# Altium PCB modFOC-MCU.PcbDoc (part 1 of 2)
Units mm, origin at the board's own origin, x right, y up, seen from the top; angles counter-clockwise.
Board outline 45 x 45 mm, 4 copper layers (Top Layer, Mid Layer 1, Mid Layer 2, Bottom Layer), stack 1.531 mm thick; 54 components, 57 nets, 316 pads, 159 vias.
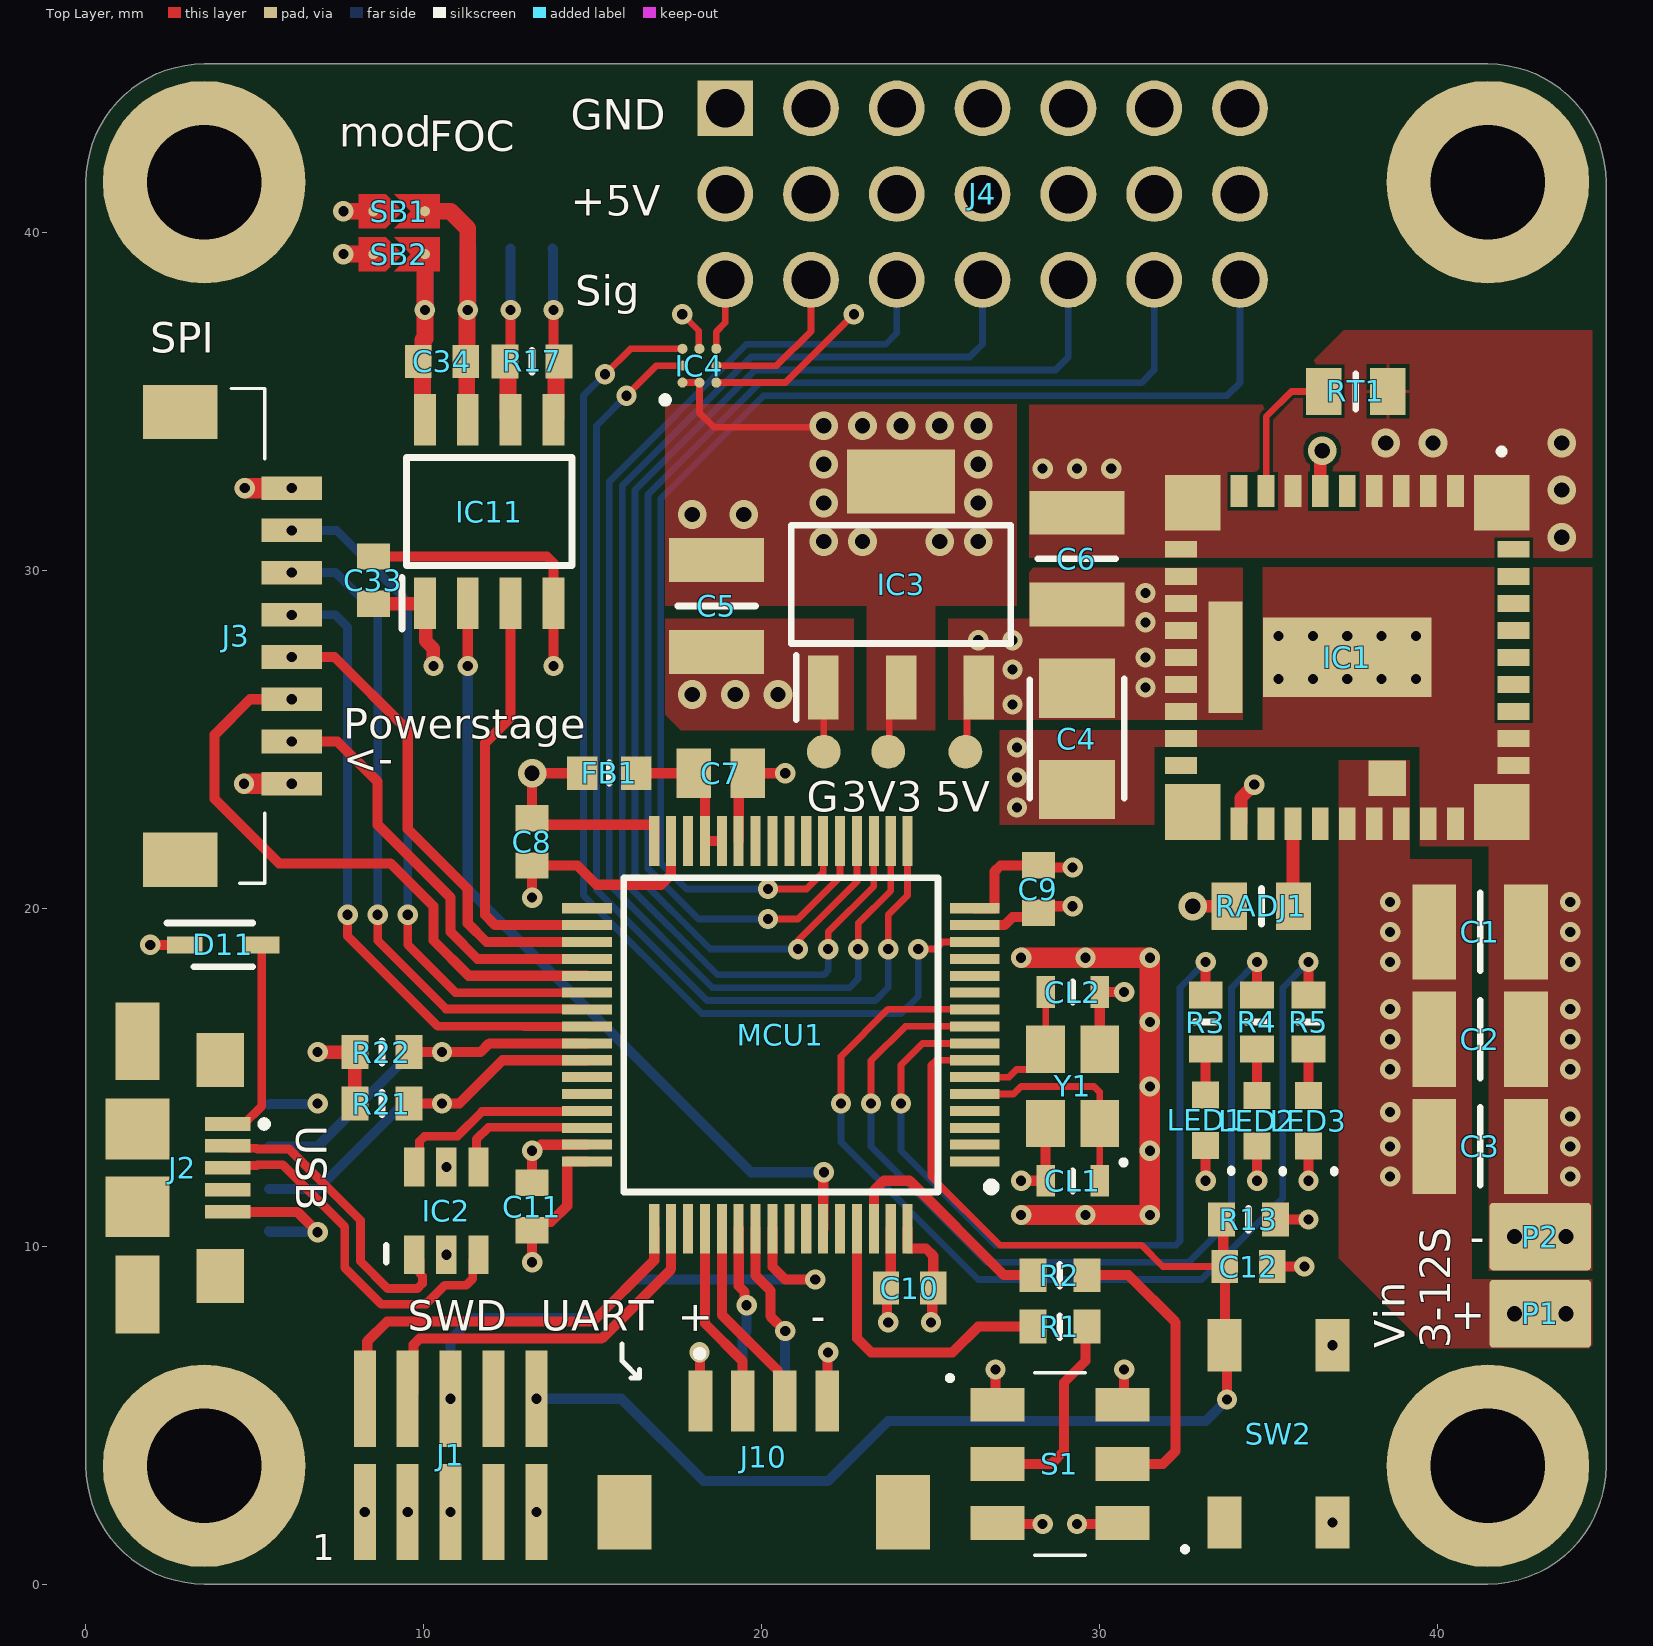
[diagram p0: Top Layer view]
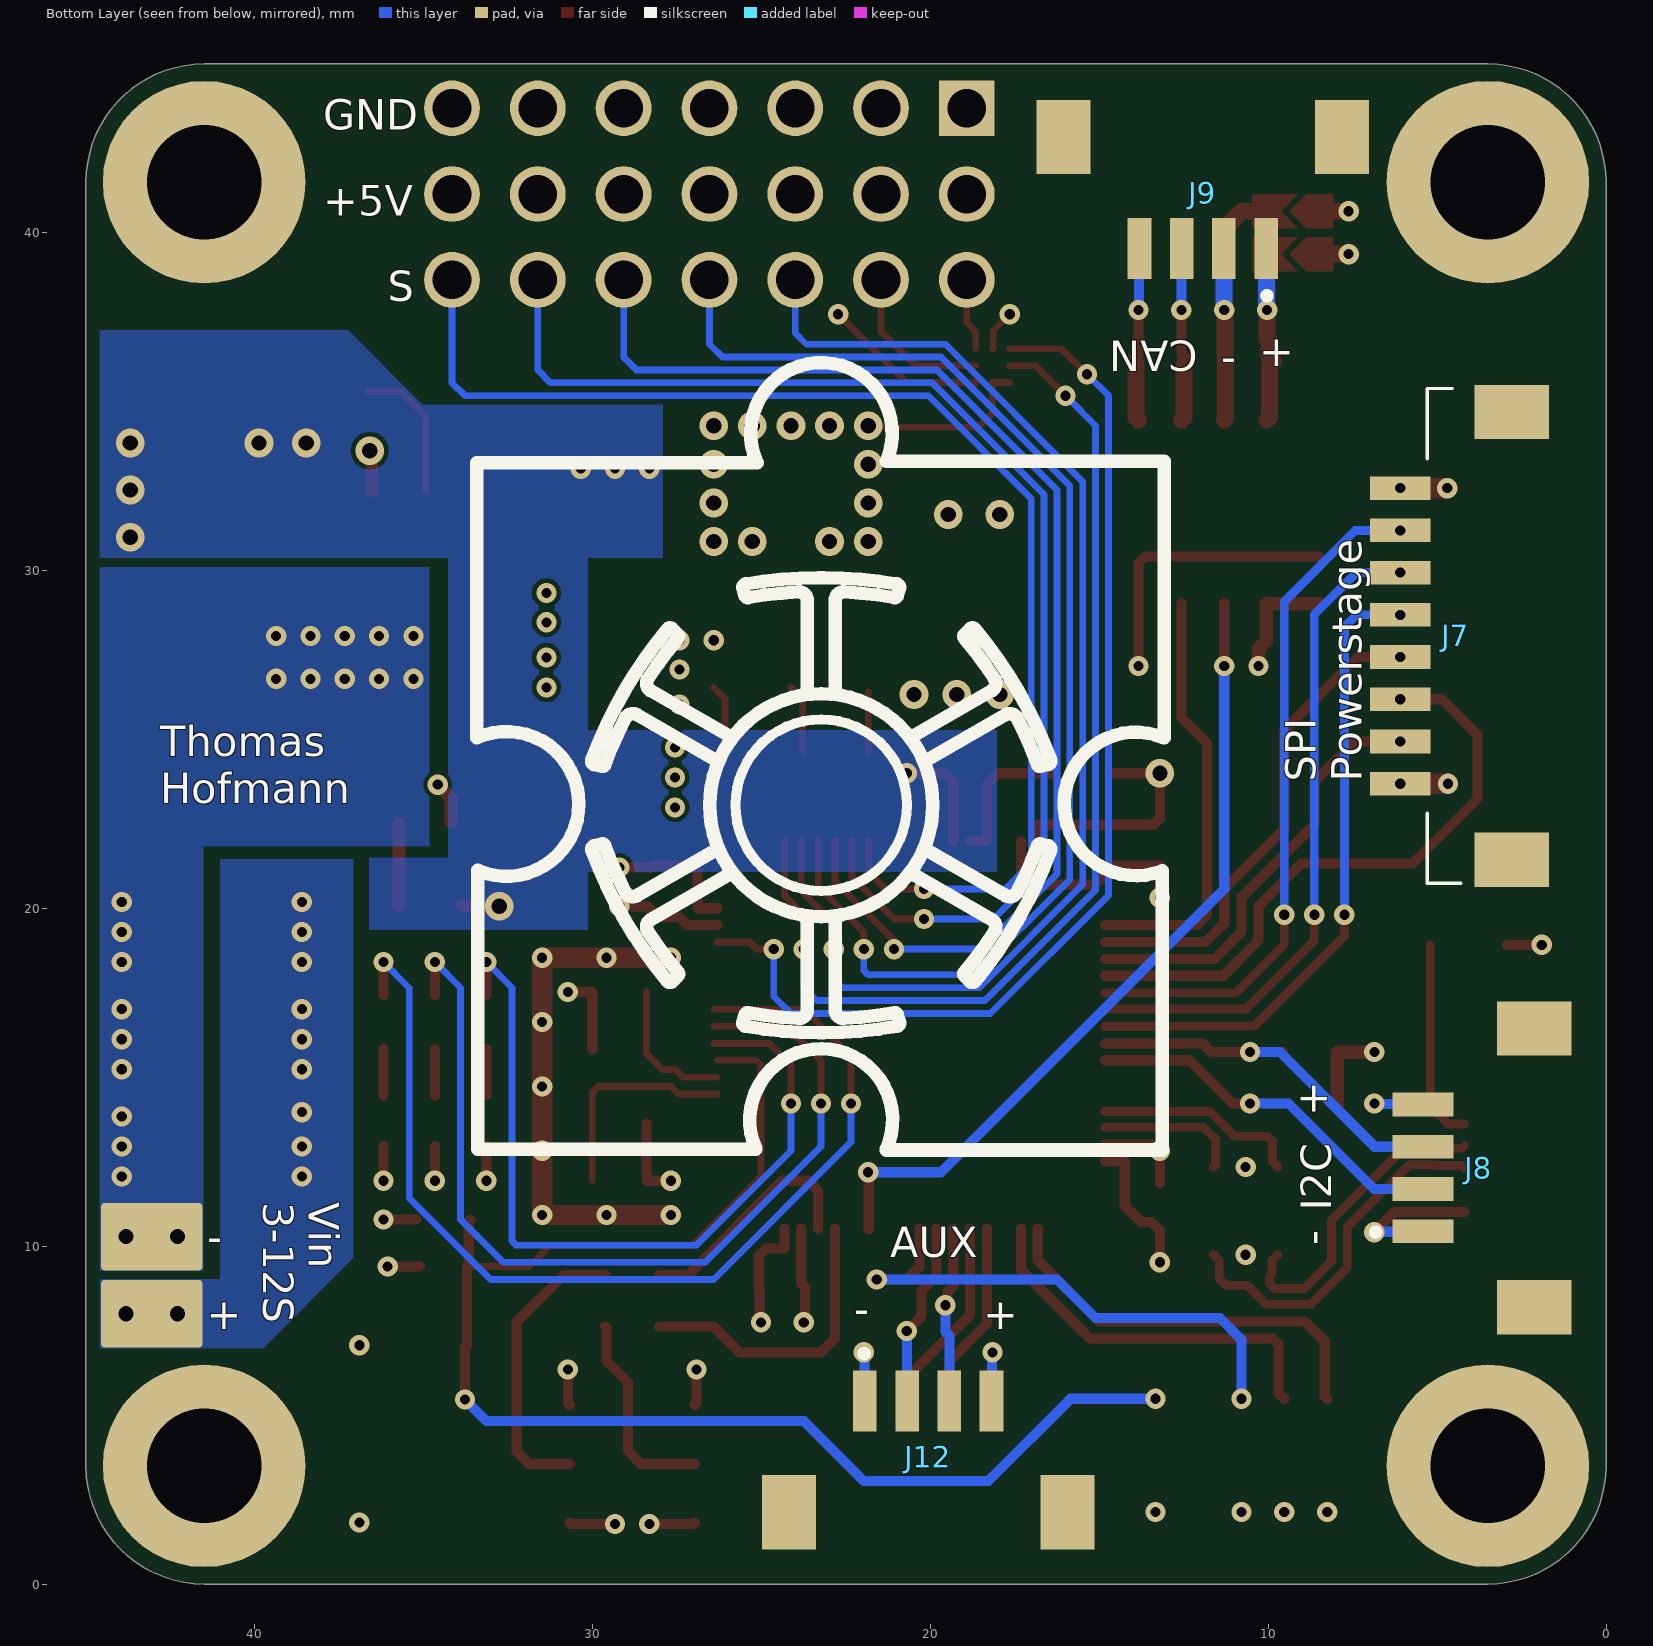
[diagram p1: Bottom Layer view, seen from below]
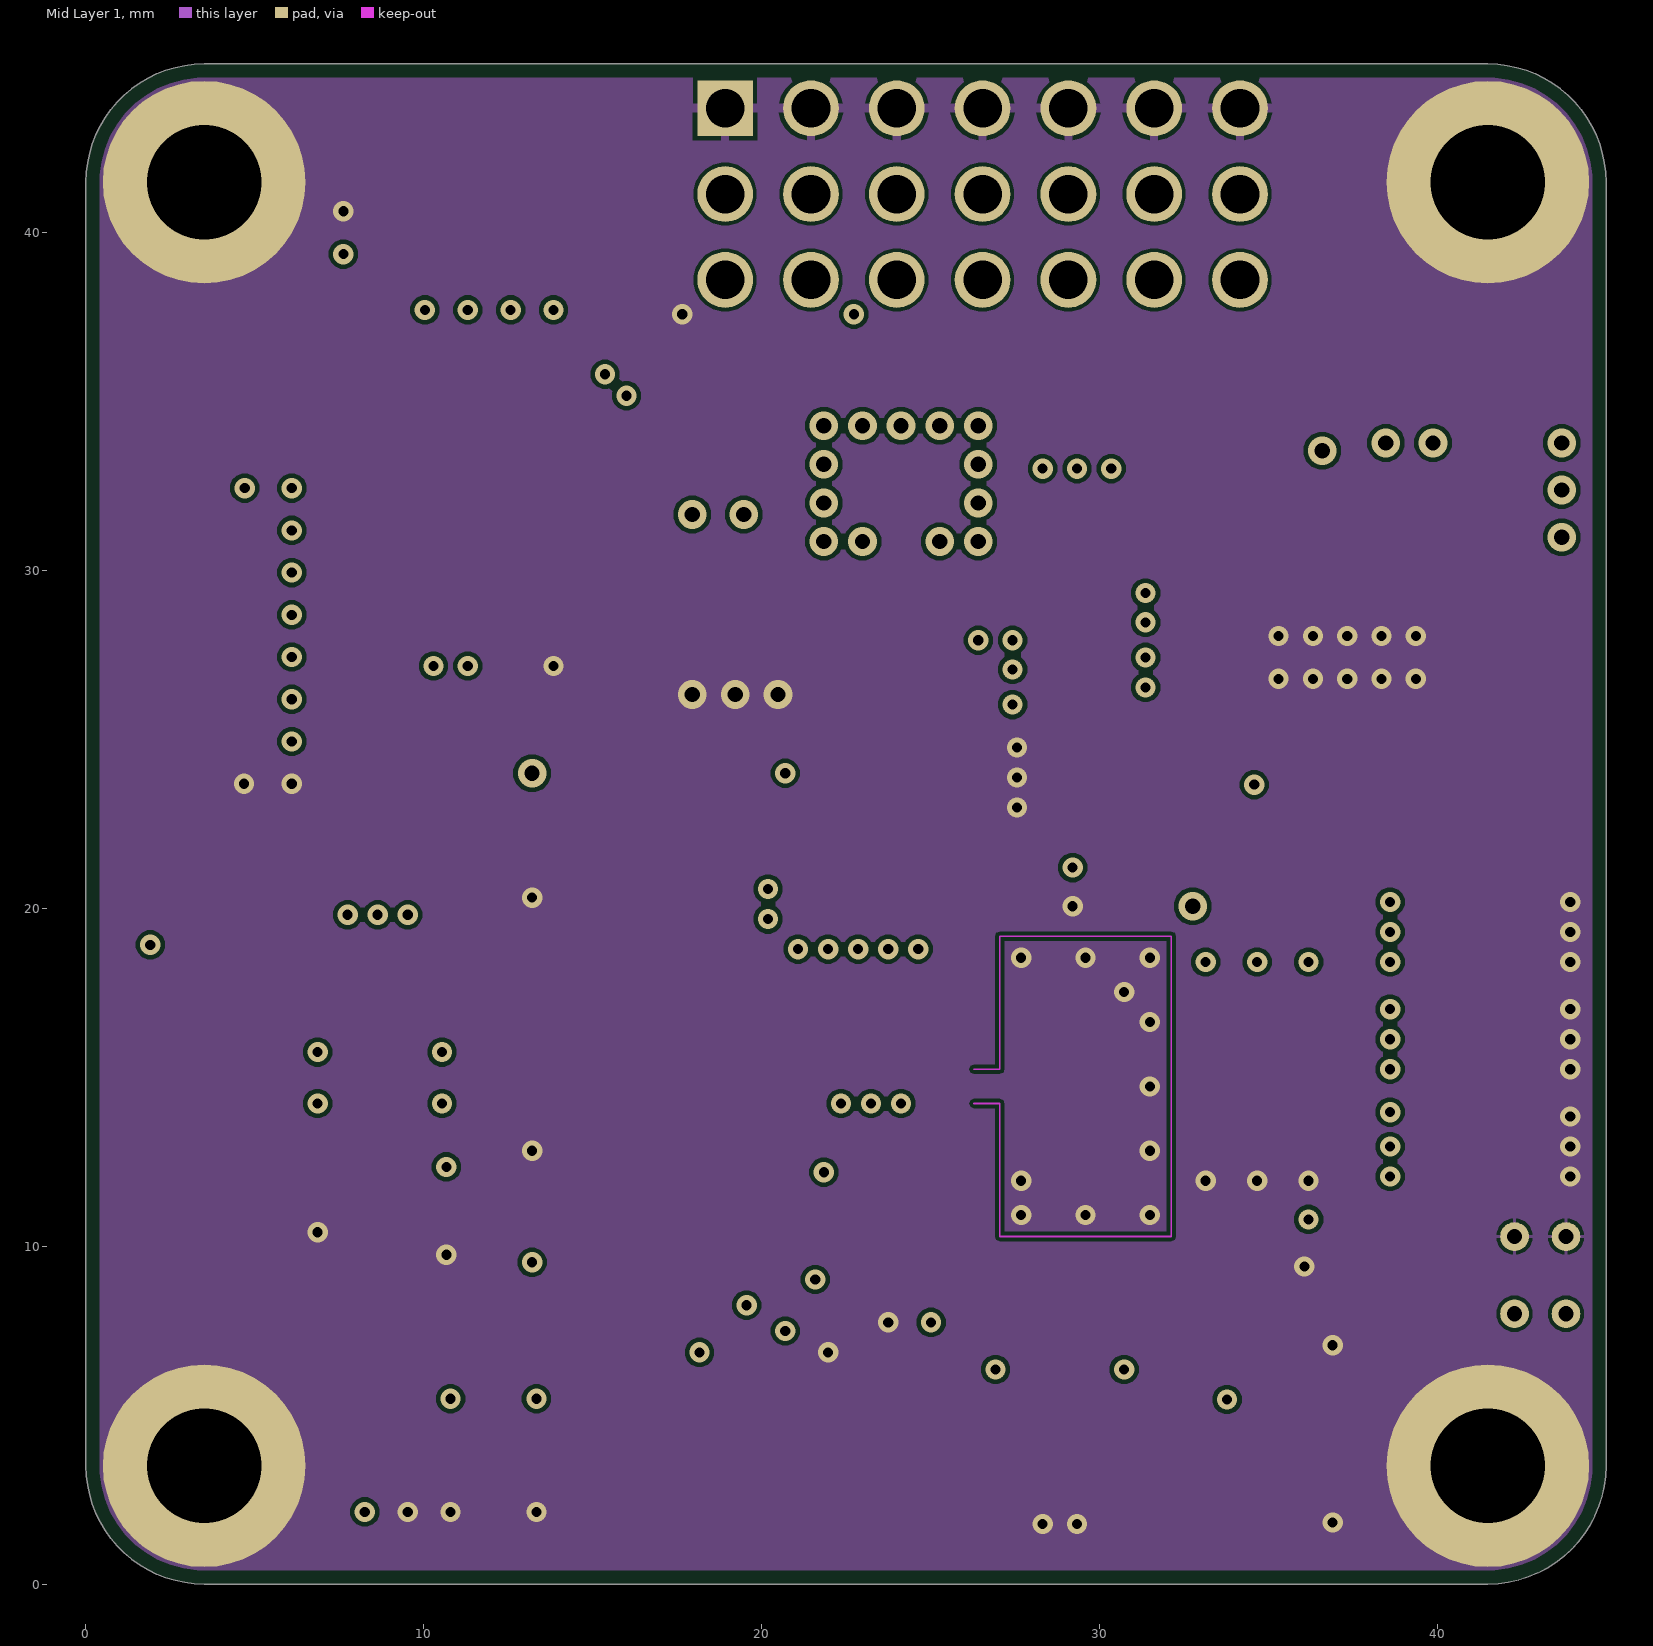
[diagram p2: Mid Layer 1]
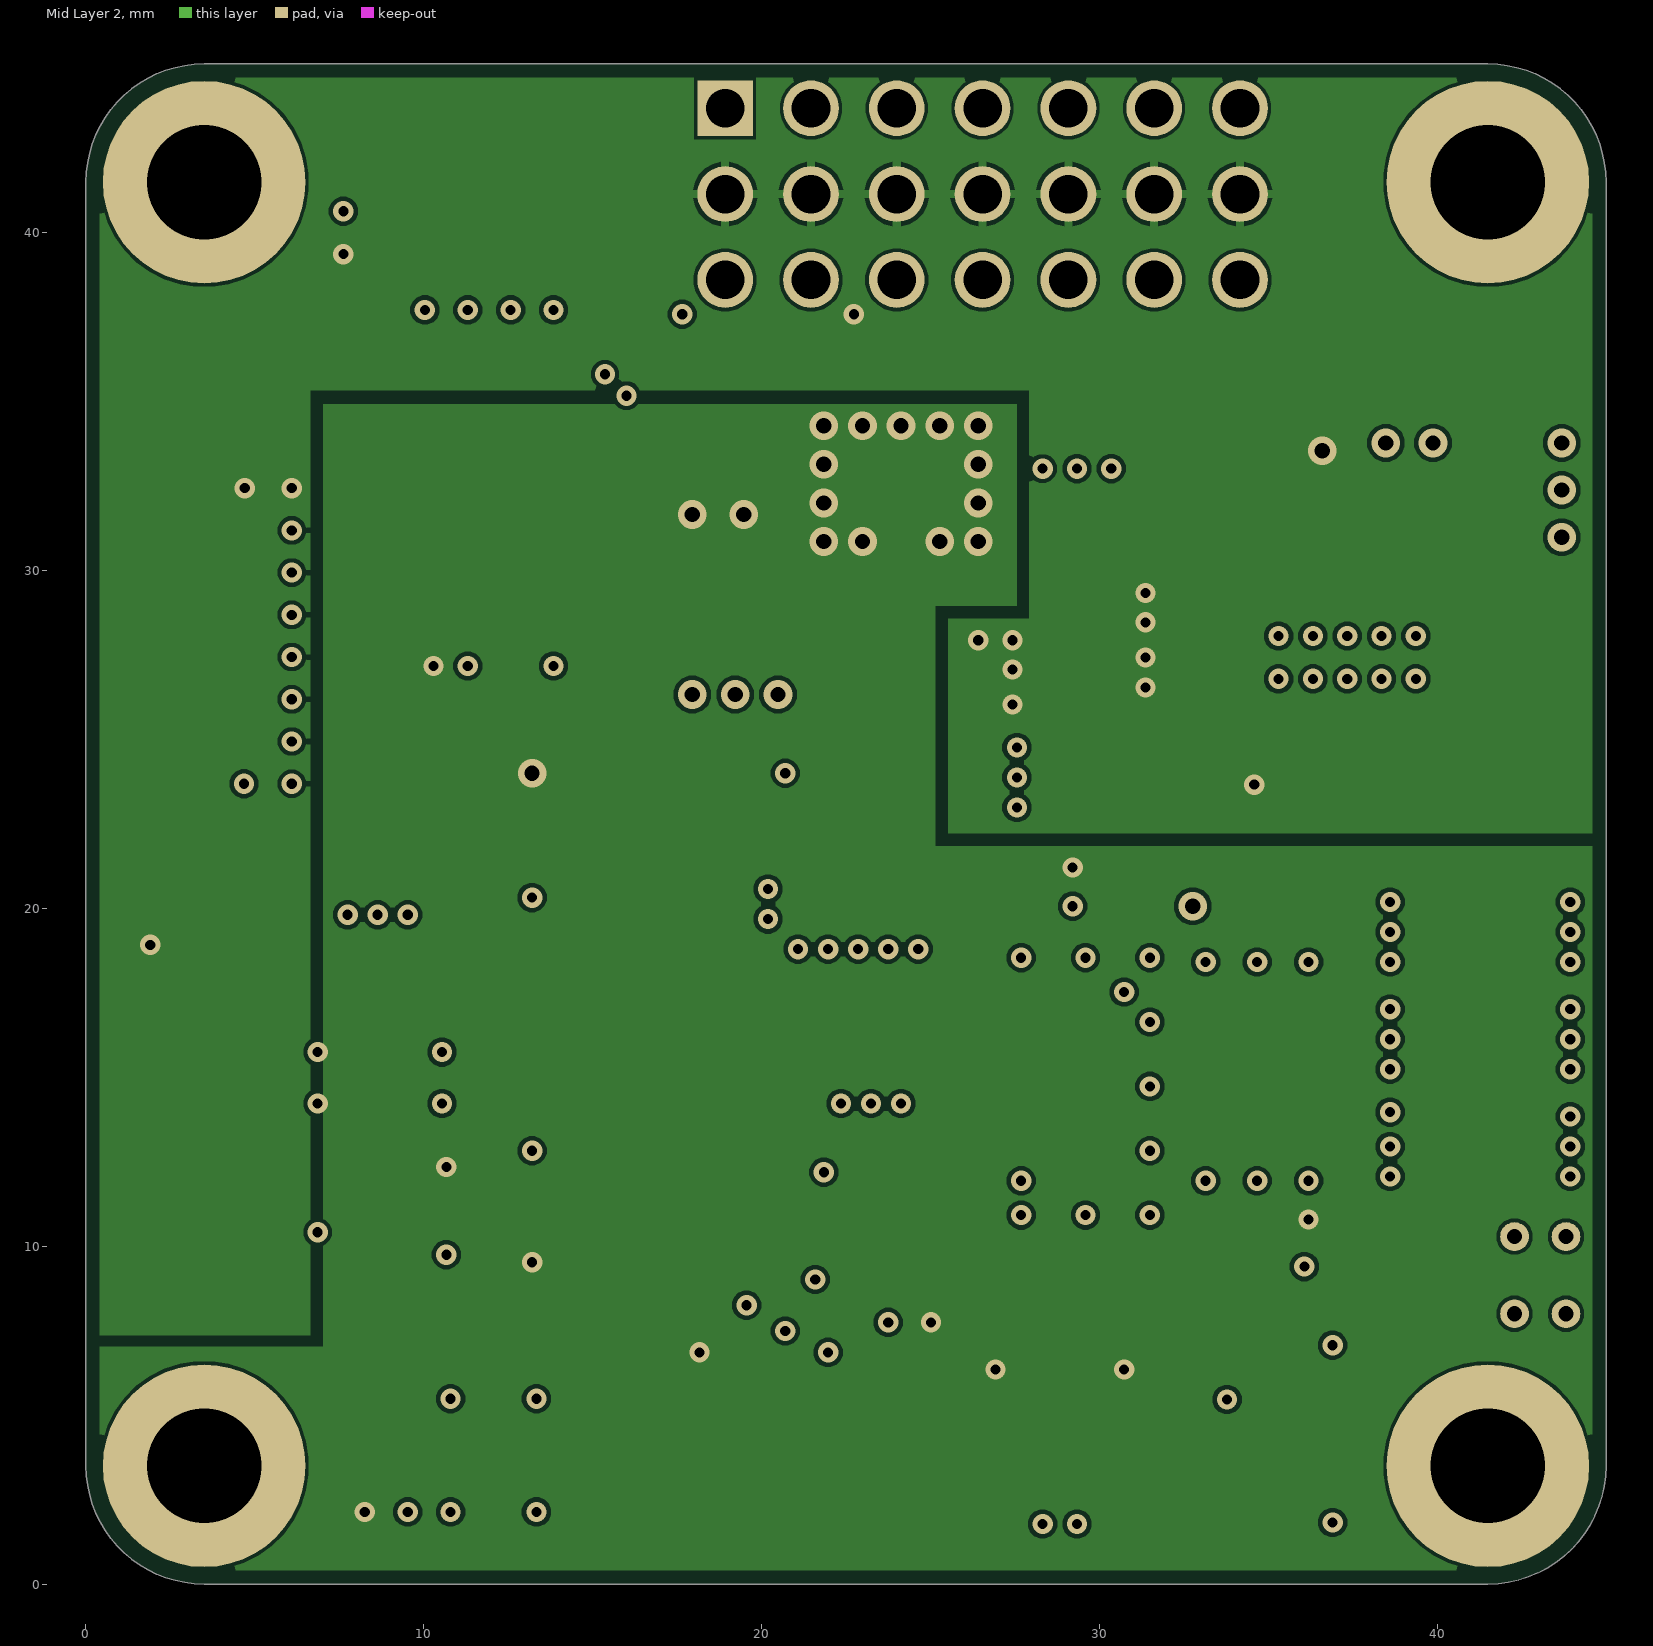
[diagram p3: Mid Layer 2]
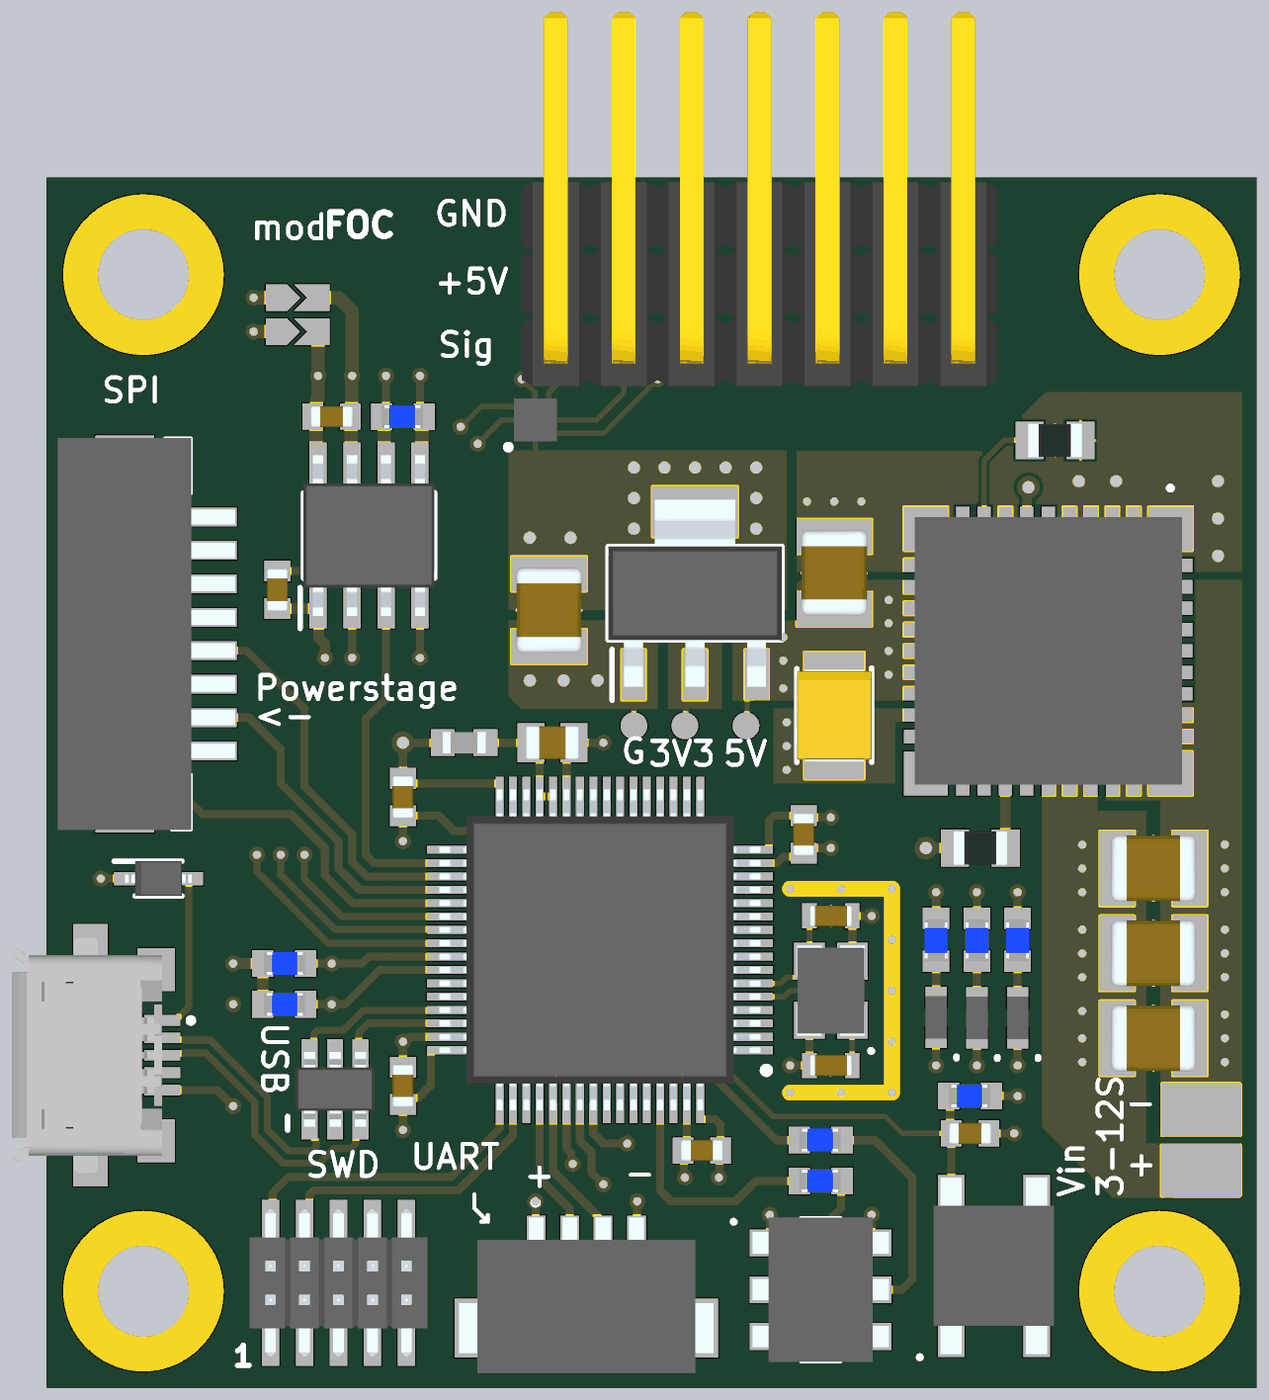
[diagram p4: 3D render of the assembled board from above, using the file's embedded part models]
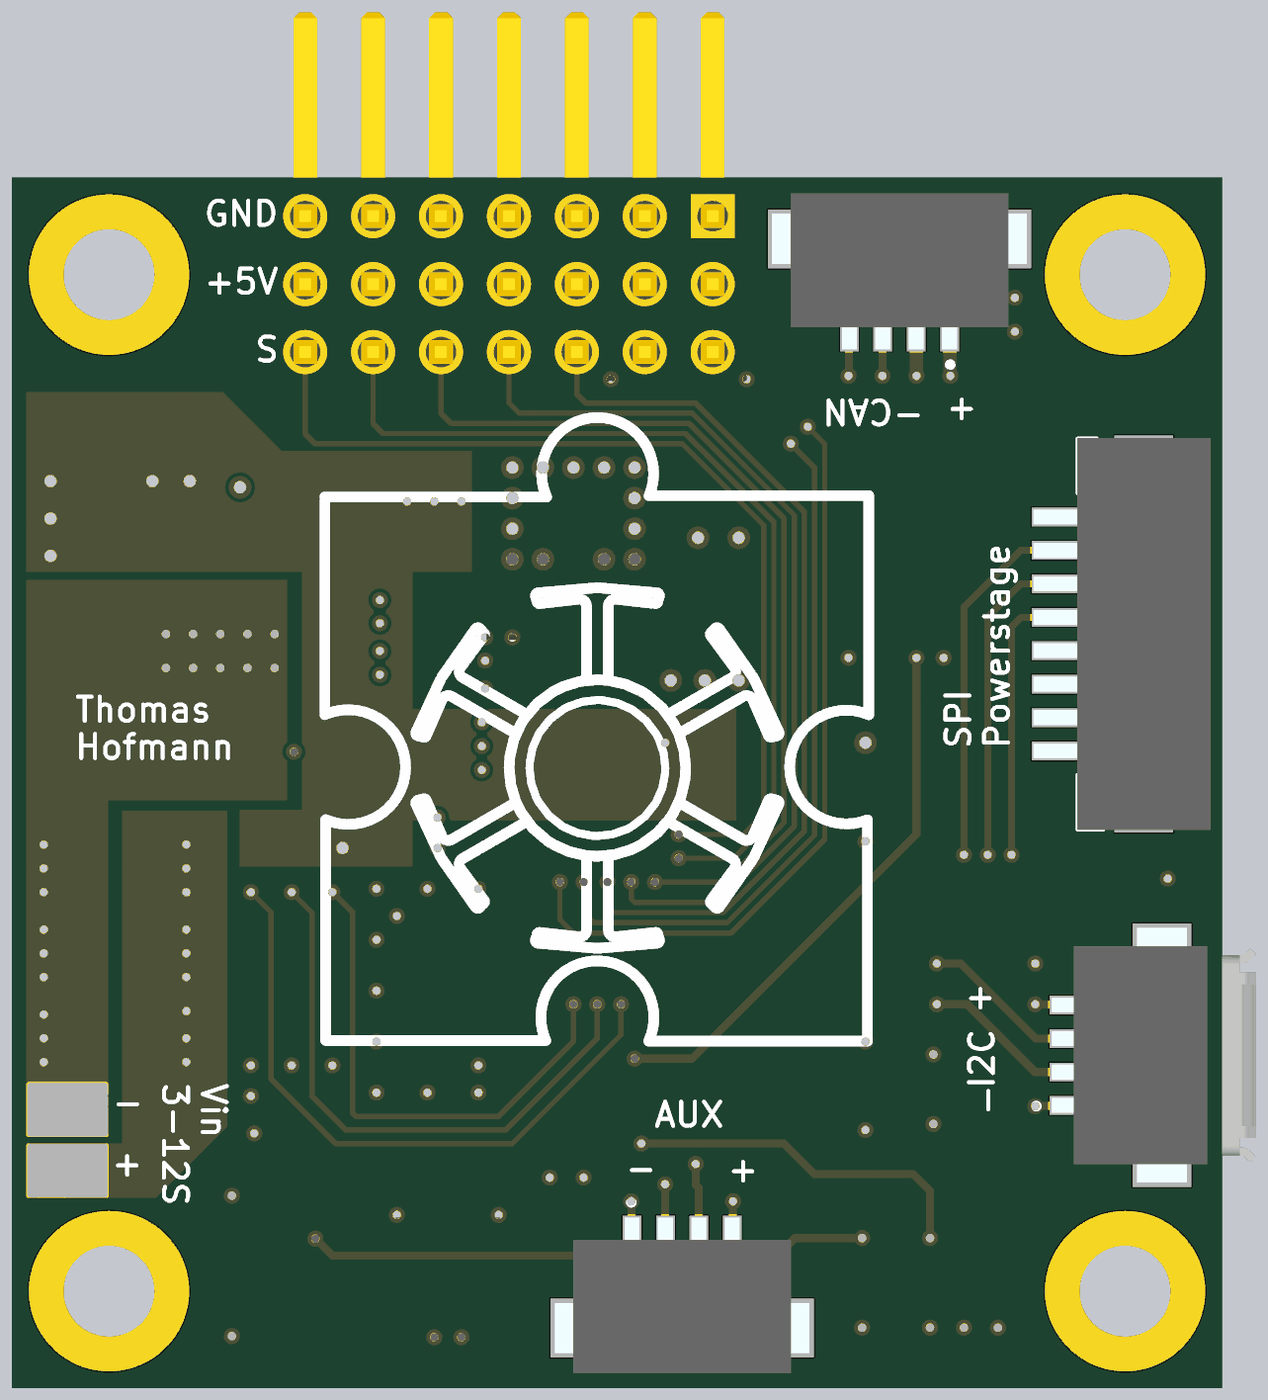
[diagram p5: 3D render of the assembled board from below, using the file's embedded part models]

## Layer stack, top to bottom
Top Solder: solder mask 0.0127, Solder Resist, Dk 3.8
Top Layer: signal copper 0.035
Dielectric 1: prepreg 0.1803, 7628, Dk 4.6
Mid Layer 1: signal copper 0.0175
Core: core 1.065, FR-4, Dk 4.5
Mid Layer 2: signal copper 0.0175
Dielectric 2: prepreg 0.1803, 7628, Dk 4.6
Bottom Layer: signal copper 0.035
Bottom Solder: solder mask 0.0127, Solder Resist, Dk 3.8

## Board outline
45,41.5 ccw(c41.5,41.5) 41.5,45 3.5,45 ccw(c3.5,41.5) 0,41.5 0,3.5 ccw(c3.5,3.5) 3.5,0 41.5,0 ccw(c41.5,3.5) 45,3.5

## Design rules (kind name [scope] priority, off if disabled: settings)
AcuteAngle [All] p1: minimum=6.00000000000000E+0001 checktracksonly=FALSE
BoardOutlineClearance [All] p1: gap=0.4 ignorepadtopadclearanceinfootprint=FALSE
Clearance [All] p1: gap=0.102 ignorepadtopadclearanceinfootprint=FALSE except(0.127: Arc-Arc Arc-Track Track-Track SMDPad-SMDPad SMDPad-Via THPad-Via Via-Fill Via-Poly Via-Region Via-Text; 0.2: Arc-SMDPad Track-SMDPad; 0.25: Arc-Hole Track-Hole SMDPad-Hole THPad-Hole Via-Hole Fill-Hole Poly-Hole Region-Hole Text-Hole; 0.254: Arc-Via Track-Via Via-Via; 0.33: Arc-THPad Track-THPad)
ComponentClearance [All] p1: gap=0.102 collisioncheckmode=3 verticalgap=0.102 showdistances=TRUE
DiffPairsRouting "Schematic Differential Pairs Routing_3" [InNet('USB-D_P')] p1: maxlimit=0.254 minlimit=0.203 mostfreqgap=0.254 toplayer_maxgap=0.203 toplayer_prefgap=0.203 toplayer_minwidth=0.261 toplayer_maxwidth=0.261 toplayer_prefwidth=0.261 midlayer1_minwidth=0.381 midlayer1_maxwidth=0.381 midlayer1_prefwidth=0.381 midlayer2_minwidth=0.381 midlayer2_maxwidth=0.381 midlayer2_prefwidth=0.381 bottomlayer_maxgap=0.203 bottomlayer_prefgap=0.203 bottomlayer_minwidth=0.261 bottomlayer_maxwidth=0.261 bottomlayer_prefwidth=0.261 impedanceprofiledriven=TRUE impedanceprofileid={FED37976-4A96-4117-917E-B578259A096B} maxuncoupledlength=12.7
DiffPairsRouting "Schematic Differential Pairs Routing_2" [InNet('USB-Con-D_P')] p2: maxlimit=0.254 minlimit=0.203 mostfreqgap=0.254 toplayer_maxgap=0.203 toplayer_prefgap=0.203 toplayer_minwidth=0.261 toplayer_maxwidth=0.261 toplayer_prefwidth=0.261 midlayer1_minwidth=0.381 midlayer1_maxwidth=0.381 midlayer1_prefwidth=0.381 midlayer2_minwidth=0.381 midlayer2_maxwidth=0.381 midlayer2_prefwidth=0.381 bottomlayer_maxgap=0.203 bottomlayer_prefgap=0.203 bottomlayer_minwidth=0.261 bottomlayer_maxwidth=0.261 bottomlayer_prefwidth=0.261 impedanceprofiledriven=TRUE impedanceprofileid={FED37976-4A96-4117-917E-B578259A096B} maxuncoupledlength=12.7
DiffPairsRouting [All] p3: maxlimit=0.102 minlimit=0.102 mostfreqgap=0.102 toplayer_minwidth=0.102 toplayer_maxwidth=1816.048 toplayer_prefwidth=0.102 midlayer1_minwidth=0.102 midlayer1_maxwidth=1816.048 midlayer1_prefwidth=0.102 midlayer2_minwidth=0.102 midlayer2_maxwidth=1816.048 midlayer2_prefwidth=0.102 bottomlayer_minwidth=0.102 bottomlayer_maxwidth=1816.048 bottomlayer_prefwidth=0.102 maxuncoupledlength=12.7
Height [All] p1: minheight=0 maxheight=1816.048 prefheight=12.7
HoleSize [All] p1: absolutevalues=TRUE maxlimit=6.3 minlimit=0.3 maxpercent=80.000 minpercent=20.000
HoleToHoleClearance [All] p1: gap=0.5 allowstackedmicrovias=FALSE
MinimumAnnularRing [All] p1: minimumring=0.13
MinimumSolderMaskSliver [All] p1: minsoldermaskwidth=0.1
PlaneClearance [All] p1: clearance=0.102
PlaneConnect PlaneConnectPowerPads [InPadClass('PowerPads')] p1: planeconnectstyle=Direct reliefexpansion=0.508 reliefentries=4 reliefconductorwidth=0.254 reliefairgap=0.254
PlaneConnect [All] p2: pad.planeconnectstyle=Relief pad.reliefexpansion=0.3 pad.reliefentries=4 pad.reliefconductorwidth=0.102 pad.reliefairgap=0.102 via.planeconnectstyle=Direct via.reliefexpansion=0.3 via.reliefentries=4 via.reliefconductorwidth=0.127 via.reliefairgap=0.127
PolygonConnect PolygonConnectPowerPads [All vs (InPadClass('PowerPads'))] p1: connectstyle=Direct reliefconductorwidth=0.254 reliefentries=4 polygonreliefangle="90 Angle" airgapwidth=0.254
PolygonConnect [All] p2: thpad.connectstyle=Relief thpad.reliefconductorwidth=0.102 thpad.reliefentries=4 thpad.polygonreliefangle="90 Angle" thpad.airgapwidth=0.102 smdpad.connectstyle=Relief smdpad.reliefconductorwidth=0.102 smdpad.reliefentries=4 smdpad.polygonreliefangle="90 Angle" smdpad.airgapwidth=0.102 via.connectstyle=Direct via.reliefconductorwidth=0.127 via.reliefentries=4 via.polygonreliefangle="90 Angle" via.airgapwidth=0.127
RoutingVias [All] p1: holewidth=0.45 width=0.85 viastyle="Through Hole" minholewidth=0.3 minwidth=0.6 maxholewidth=6.3 maxwidth=6.55
SilkToSilkClearance [All] p1: silktosilkclearance=0
SilkToSolderMaskClearance [IsPad] p1: minsilkscreentomaskgap=0.15 clearancetoexposedcopper=TRUE
SolderMaskExpansion "SolderMaskExpansion Vias" [IsVia] p1: expansion=0.102 istentingtop=TRUE
SolderMaskExpansion [All] p2: expansion=0.05 istentingtop=FALSE
Width [All] p1: maxlimit=50 minlimit=0.102 preferedwidth=0.3 midlayer1_minwidth=0.127 midlayer2_minwidth=0.127 minimp=50.000000 maximp=50.000000 favimp=50.000000
20 further rules are at their usual default settings.

## Classes and differential pairs
component class modFOC-Power_Module: C1 C2 C3 C4 C5 C6 IC1 IC3 P1 P2 RADJ1 RT1
component class modFOC-MCU: C7 C8 C9 C10 C11 C12 CL1 CL2 D11 FB1 IC2 J1 J2 LED1 LED2 LED3 MCU1 R1 R2 R3 R4 R5 R13 S1 SW2 Y1
component class modFOC-IO: C33 C34 IC4 IC11 J3 J4 J7 J8 J9 J10 J12 R17 R21 R22 SB1 SB2
differential pair USB-D: +USB-D_P -USB-D_N
differential pair USB-Con-D: +USB-Con-D_P -USB-Con-D_N

## Components (designator, comment, footprint, x,y, rotation, side; value= is the part's Value field where it differs from the comment)
C1 "10uF" CAPC3225X280N 41.275,19.304 r0 top
C2 "10uF" CAPC3225X280N 41.275,16.129 r0 top
C3 "10uF" CAPC3225X280N 41.275,12.954 r0 top
C4 "100uF" CAPPM3528X200N 29.337,25.019 r270 top
C5 "10uF" CAPC3225X280N 18.669,28.956 r270 top
C6 "10uF" CAPC3225X280N 29.337,30.353 r90 top
C7 "10nF" CAPC2012X88N 18.796,24.003 r0 top
C8 "100nF" CAPC1608X97N 13.208,21.971 r270 top
C9 "100nF" CAPC1608X97N 28.194,20.574 r270 top
C10 "100nF" CAPC1608X97N 24.384,8.763 r180 top
C11 "100nF" CAPC1608X97N 13.208,11.176 r90 top
C12 "100nF" CAPC1608X97N 34.417,9.398 r0 top
C33 "100nF" CAPC1608X97N 8.509,29.718 r90 top
C34 "100nF" CAPC1608X97N 10.541,36.195 r180 top
CL1 "4pF" CAPC1608X90N 29.21,11.938 r0 top
CL2 "4pF" CAPC1608X90N 29.21,17.526 r180 top
D11 "BAS3010A03WE6327HTSA1" SOD2513X110N 4.064,18.923 r0 top
FB1 "220 Ohm" BEADC1608X75N 15.494,24.003 r0 top
IC1 "LMZ36002RVQT" LMZ36002RVQR 37.338,27.432 r180 top
IC2 "USBLC6-2SC6" SOT95P280X145-6N 10.668,11.049 r90 top
IC3 "AP2114H-3.3TRG1" SOT230P700X180-4N 24.13,29.591 r90 top
IC4 "MAX3394EEBL+T" BGA8C50P3X3_160X160X67 18.161,36.068 r90 top
IC11 "ISO1044BDR" SOIC127P600X175-8N 11.938,31.75 r90 top
J1 "SWD" HUSSP10W40P127_2X5_635X340X420P 10.795,3.81 r0 top
J2 "Micro-USB" 19815841 1.524,12.319 r270 top
J3 "8_PIN" DF13A8P125H21 2.794,28.067 r90 top
J4 "TSW-107-08-G-T-RA" TSW-107-08-T-T-RA_SAI 18.923,43.688 r0 top
J7 "8_PIN" DF13A8P125H21 2.794,28.067 r270 bottom
J8 "DF13A-4P-1.25H_21_" DF13A4P125H21 2.921,12.319 r270 bottom
J9 "DF13A-4P-1.25H_21_" DF13A4P125H21 11.938,42.037 r180 bottom
J10 "DF13A-4P-1.25H_21_" DF13A4P125H21 20.066,2.921 r180 top
J12 "DF13A-4P-1.25H_21_" DF13A4P125H21 20.066,2.921 r0 bottom
LED1 "Green" LGQ396PS35 33.145,13.732 r90 top
LED2 "Green" LGQ396PS35 34.671,13.716 r90 top
LED3 "Green" LGQ396PS35 36.195,13.716 r90 top
MCU1 "STM32G474RBT6" QFP50P1200X1200X160-64N 20.574,16.256 r180 top
P1 "PowerPad" POWER_PAD_S 43.053,8.001 r0 top
P2 "PowerPad" POWER_PAD_S 43.053,10.287 r0 top
R1 "10k" RESC1608X55N 28.829,7.62 r180 top
R2 "10k" RESC1608X55N 28.829,9.144 r180 top
R3 "1k" RESC1608X55N 33.147,16.637 r270 top
R4 "1k" RESC1608X55N 34.671,16.637 r270 top
R5 "1k" RESC1608X55N 36.195,16.637 r270 top
R13 "10k" RESC1608X55N 34.417,10.795 r180 top
R17 "120R" RESC1608X55N 13.208,36.195 r180 top
R21 "10k" RESC1608X55N 8.763,14.224 r0 top
R22 "10k" RESC1608X55N 8.763,15.748 r0 top
RADJ1 "5.05k" R0805 34.798,20.066 r180 top
RT1 "49.9k" R0805 37.592,35.306 r0 top
S1 "CAS-D20A1" CASD20A1 28.829,3.556 r270 top
SB1 "Solder Bridge" SOLDER-BRIDGE_R0603-0R 9.271,40.64 r0 top
SB2 "Solder Bridge" SOLDER-BRIDGE_R0603-0R 9.271,39.37 r0 top
SW2 "RST" PTS647SK38SMTR2LFS 35.306,4.445 r90 top
Y1 "ABM8W-16.0000MHZ-8-B1U-T3" ABM8W160000MHZ8B1UT3 29.21,14.732 r90 top

## Footprints (in the part's own frame and the unit in brackets; to place one, negate y for a bottom-side part, rotate by r counter-clockwise, add the part's x,y. Pads: shape width x height; smd on the part's side, far side on the other; paste and mask are expansions set on the pad)
19815841 [mm]
  rect 0.4x1.35 smd: 1(-1.3,2.675) 2(-0.65,2.675) 3(0,2.675) 4(0.65,2.675) 5(1.3,2.675)
  rect 1.6x1.4 smd: 6(-3.2,2.45) 7(3.2,2.45)
  rect 2.3x1.3 smd: 8(-3.75,0) 9(3.75,0)
  rect 1.8x1.9 smd: 10(-1.15,0) 11(1.15,0)
  silkscreen extent -1.4,3.65 -1.2,3.85, body extent -4.4,-2.93 4.4,2.68, height 2.8
ABM8W160000MHZ8B1UT3 [mm]
  rect 1.4x1.15 smd: 1(-1.1,-0.8) 2(1.1,-0.8) 3(1.1,0.8) 4(-1.1,0.8)
  silkscreen extent -2.3,-1.56 -2.2,-1.46, body extent -1.69,-1.26 1.69,1.26, height 0.85
BEADC1608X75N [mm]
  rect 0.9x1 smd: 1(-0.8,0) 2(0.8,0)
  silkscreen extent 0,-0.3 0,0.3, body extent -0.8,-0.4 0.8,0.4, height 0.75
BGA8C50P3X3_160X160X67 [mm]
  round 0.3 smd: A1(-0.5,0.5) A2(0,0.5) A3(0.5,0.5) B1(-0.5,0) B3(0.5,0) C1(-0.5,-0.5) C2(0,-0.5) C3(0.5,-0.5)
  silkscreen extent -1.11,0.91 -0.92,1.11, body extent -0.8,-0.8 0.8,0.8, height 0.67
CAPC1608X90N [mm]
  rect 0.54x0.94 smd: 1(-0.8,0) 2(0.8,0)
  silkscreen extent 0,-0.3 0,0.3, body extent -0.8,-0.4 0.8,0.4, height 0.9
CAPC1608X97N [mm]
  rect 0.78x0.98 smd: 1(-0.7,0) 2(0.7,0)
  body extent -0.8,-0.4 0.8,0.4, height 0.97
CAPC2012X88N [mm]
  rect 1.02x1.47 smd: 1(-0.8,0) 2(0.8,0)
  body extent -1,-0.63 1,0.63, height 0.88
CAPC3225X280N [mm]
  rect 1.3x2.82 smd: 1(-1.36,0) 2(1.36,0)
  silkscreen extent 0,-1.15 0,1.15, body extent -1.6,-1.25 1.6,1.25, height 2.8
CAPPM3528X200N [mm]
  rect 1.75x2.25 smd: 1(-1.5,0) 2(1.5,0)
  silkscreen extent -1.78,-1.4 1.75,1.4, body extent -1.75,-1.4 1.75,1.4, height 2
CASD20A1 [mm]
  rect 1x1.6 smd: 1(-1.75,-1.85) 2(0,-1.85) 3(1.75,-1.85) 4(-1.75,1.85) 5(0,1.85) 6(1.75,1.85)
  silkscreen extent -2.7,-3.3 2.7,0.75, body extent -2.7,-2.55 2.7,2.55, height 2.6
DF13A4P125H21 [mm]
  rect 0.7x1.8 smd: 1(1.875,-2.5) 2(0.625,-2.5) 3(-0.625,-2.5) 4(-1.875,-2.5)
  rect 1.6x2.2 smd: MP1(-4.125,0.8) MP2(4.125,0.8)
  silkscreen extent 1.8,-4 2,-3.8, body extent -4.76,-3.33 4.76,2.5, height 3.7
DF13A8P125H21 [mm]
  rect 0.7x1.8 smd: 1(4.375,-3.3) 2(3.125,-3.3) 3(1.875,-3.3) 4(0.625,-3.3) 5(-0.625,-3.3) 6(-1.875,-3.3) 7(-3.125,-3.3) 8(-4.375,-3.3)
  rect 1.6x2.2 smd: MP1(-6.625,0) MP2(6.625,0)
  silkscreen extent -7.32,-2.5 7.32,-1.5, body extent -7.32,-4.13 7.32,2.5, height 3.7
HUSSP10W40P127_2X5_635X340X420P [mm]
  rect 0.65x2.85 smd: 1(-2.54,-1.675) 2(-2.54,1.675) 3(-1.27,-1.675) 4(-1.27,1.675) 5(0,-1.675) 6(0,1.675) 7(1.27,-1.675) 8(1.27,1.675) 9(2.54,-1.675) 10(2.54,1.675)
  body extent -3.32,-2.75 3.32,2.75, height 5.13
LGQ396PS35 [mm]
  rect 0.8x0.8 smd: 1(-0.75,0) 2(0.75,0)
  silkscreen extent -1.52,-0.76 -1.47,-0.76, body extent -0.8,-0.4 0.8,0.4, height 0.5
LMZ36002RVQR [mm]
  rect 1.65x1.65 smd: 1(-4.575,-4.575) 11(4.575,-4.575) 21(4.575,4.575) 31(-4.575,4.575)
  rect 0.5x0.95 smd: 2(-3.2,-4.925) 3(-2.4,-4.925) 4(-1.6,-4.925) 5(-0.8,-4.925) 6(0,-4.925) 7(0.8,-4.925) 8(1.6,-4.925) 9(2.4,-4.925) 10(3.2,-4.925) 22(3.2,4.925) 23(2.4,4.925) 24(1.6,4.925) 25(0.8,4.925) 26(0,4.925) 27(-0.8,4.925) 28(-1.6,4.925) 29(-2.4,4.925) 30(-3.2,4.925)
  rect 0.95x0.5 smd: 12(4.925,-3.2) 13(4.925,-2.4) 14(4.925,-1.6) 15(4.925,-0.8) 16(4.925,0) 17(4.925,0.8) 18(4.925,1.6) 19(4.925,2.4) 20(4.925,3.2) 32(-4.925,3.2) 33(-4.925,2.4) 34(-4.925,1.6) 35(-4.925,0.8) 36(-4.925,0) 37(-4.925,-0.8) 38(-4.925,-1.6) 39(-4.925,-2.4) 40(-4.925,-3.2)
  rect 5x2.35 smd: 41(0,0)
  rect 1.12x1.05 smd: 42(-1.187,3.575)
  rect 1x3.3 smd: 43(3.6,0)
  silkscreen extent -4.62,-6.15 -4.52,-6.05, body extent -5,-5 5,5, height 2.23
POWER_PAD_S [mm]
  round 0.85 hole 0.45: 1(-0.762,0) 1(0.762,0)
  rrect10% 3x2 smd: 1(0,0)
  rrect10% 3x2 smd far side: 1(0,0)
PTS647SK38SMTR2LFS [mm]
  rect 1.55x1 smd: 1(-2.625,1.6) 2(2.625,1.6) 3(-2.625,-1.6) 4(2.625,-1.6)
  silkscreen extent -3.46,2.72 -3.36,2.82, body extent -3.3,-2.25 3.3,2.25, height 3.9
QFP50P1200X1200X160-64N [mm]
  rect 1.475x0.298 smd: 1(-5.738,3.75) 2(-5.738,3.25) 3(-5.738,2.75) 4(-5.738,2.25) 5(-5.738,1.75) 6(-5.738,1.25) 7(-5.738,0.75) 8(-5.738,0.25) 9(-5.738,-0.25) 10(-5.738,-0.75) 11(-5.738,-1.25) 12(-5.738,-1.75) 13(-5.738,-2.25) 14(-5.738,-2.75) 15(-5.738,-3.25) 16(-5.738,-3.75) 33(5.738,-3.75) 34(5.738,-3.25) 35(5.738,-2.75) 36(5.738,-2.25) 37(5.738,-1.75) 38(5.738,-1.25) 39(5.738,-0.75) 40(5.738,-0.25) 41(5.738,0.25) 42(5.738,0.75) 43(5.738,1.25) 44(5.738,1.75) 45(5.738,2.25) 46(5.738,2.75) 47(5.738,3.25) 48(5.738,3.75)
  rect 0.298x1.475 smd: 17(-3.75,-5.738) 18(-3.25,-5.738) 19(-2.75,-5.738) 20(-2.25,-5.738) 21(-1.75,-5.738) 22(-1.25,-5.738) 23(-0.75,-5.738) 24(-0.25,-5.738) 25(0.25,-5.738) 26(0.75,-5.738) 27(1.25,-5.738) 28(1.75,-5.738) 29(2.25,-5.738) 30(2.75,-5.738) 31(3.25,-5.738) 32(3.75,-5.738) 49(3.75,5.738) 50(3.25,5.738) 51(2.75,5.738) 52(2.25,5.738) 53(1.75,5.738) 54(1.25,5.738) 55(0.75,5.738) 56(0.25,5.738) 57(-0.25,5.738) 58(-0.75,5.738) 59(-1.25,5.738) 60(-1.75,5.738) 61(-2.25,5.738) 62(-2.75,5.738) 63(-3.25,5.738) 64(-3.75,5.738)
  silkscreen extent -6.35,-4.65 4.65,4.65, body extent -6,-6 6,6, height 1.6
R0805 [mm]
  rect 1.05x1.4 smd: 1(-0.95,0) 2(0.95,0)
  silkscreen extent 0,-0.53 0,0.53, body extent -1,-0.63 1,0.63, height 0.7
RESC1608X55N [mm]
  rect 0.8x1 smd: 1(-0.8,0) 2(0.8,0)
  silkscreen extent 0,-0.33 0,0.33, body extent -0.75,-0.42 0.8,0.42, height 0.45
SOD2513X110N [mm]
  rect 1.05x0.5 smd: 1(-1.138,0) 2(1.138,0)
  silkscreen extent -1.66,-0.65 0.87,0.65, body extent -1.25,-0.65 1.25,0.65, height 1.1
SOIC127P600X175-8N [mm]
  rect 1.525x0.65 smd: 1(-2.712,1.905) 2(-2.712,0.635) 3(-2.712,-0.635) 4(-2.712,-1.905) 5(2.712,-1.905) 6(2.712,-0.635) 7(2.712,0.635) 8(2.712,1.905)
  silkscreen extent -3.47,-2.45 1.6,2.58, body extent -3,-2.45 3,2.45, height 1.75
SOLDER-BRIDGE_R0603-0R [mm]
  round 0.3 smd: 1(-0.762,0) 2(0.762,0)
  Top Layer region: -1.2,0.5 -1.2,-0.5 -0.4,-0.5 0.1,0 -0.4,0.5 -1.2,0.5
  Top Layer region: -0.15,-0.5 0.35,0 -0.15,0.5 1.2,0.5 1.2,-0.5 -0.15,-0.5
SOT95P280X145-6N [mm]
  rect 1.15x0.6 smd: 1(-1.3,0.95) 2(-1.3,0) 3(-1.3,-0.95) 4(1.3,-0.95) 5(1.3,0) 6(1.3,0.95)
  silkscreen extent -1.52,1.78 -1.02,1.78, body extent -1.4,-1.46 1.4,1.46, height 1.45
SOT230P700X180-4N [mm]
  rect 1.9x0.9 smd: 1(-3.05,2.3) 2(-3.05,0) 3(-3.05,-2.3)
  rect 1.9x3.2 smd: 4(3.05,0)
  silkscreen extent -4,-3.25 1.75,3.25, body extent -3.5,-3.25 3.5,3.25, height 1.8
TSW-107-08-T-T-RA_SAI [mil]
  rect 65x65 hole 45 mask+0: 1(0,0)
  round 65 hole 45 mask+0: 2(0,-100) 3(0,-200) 4(100,0) 5(100,-100) 6(100,-200) 7(200,0) 8(200,-100) 9(200,-200) 10(300,0) 11(300,-100) 12(300,-200) 13(400,0) 14(400,-100) 15(400,-200) 16(500,0) 17(500,-100) 18(500,-200) 19(600,0) 20(600,-100) 21(600,-200)
  body extent -50,-250 650,300, height 353

## Part data
C1 C2 C3 C5 C6: library part CL32B106KMVNNWE, "Capacitor", Manufacturer_Name="Samsung Electro-Mechanics", Mouser Part Number=N/A, Arrow Part Number=CL32B106KMVNNWE, Arrow Price/Stock=https://www.arrow.com/en/products/cl32b106kmvnnwe/samsung-electro-mechanics, Datasheet Link=https://www.arrow.com/en/products/cl32b106kmvnnwe/samsung-electro-mechanics, Height=2.8mm, Manufacturer_Part_Number=CL32B106KMVNNWE, Mouser Price/Stock=https://www.mouser.co.uk/ProductDetail/Samsung-Electro-Mechanics/CL32B106KMVNNWE?qs=xZ%2FP%252Ba9zWqaEMBbSgKy8gQ%3D%3D
C4: library part 8TPE100MAZB, "Capacitor Polarised", Manufacturer_Name=Panasonic, Mouser Part Number=667-8TPE100MAZB, Arrow Part Number=8TPE100MAZB, Arrow Price/Stock=https://www.arrow.com/en/products/8tpe100mazb/panasonic, Datasheet Link=http://uk.rs-online.com/web/p/products/7887374, Height=2mm, Manufacturer_Part_Number=8TPE100MAZB, Mouser Price/Stock=https://www.mouser.co.uk/ProductDetail/Panasonic/8TPE100MAZB?qs=OE1iw1LrrPHKTwwfsidxgA%3D%3D
C7: library part C0805C103J3GACTU, "Capacitor", Manufacturer_Name=Kemet, Mouser Part Number=80-C0805C103J3G, Arrow Part Number=C0805C103J3GACTU, Arrow Price/Stock=https://www.arrow.com/en/products/c0805c103j3gactu/kemet-corporation, Datasheet Link=https://componentsearchengine.com/Datasheets/2/C0805C103J3GACTU.pdf, Height=0.88mm, Manufacturer_Part_Number=C0805C103J3GACTU, Mouser Price/Stock=https://www.mouser.co.uk/ProductDetail/KEMET/C0805C103J3GACTU?qs=K%2Fj%2Fqf%252B0fqJFcB%2FiaHub0Q%3D%3D
C8 C9 C10 C11 C12 C33 C34: library part VJ0603Y104JXJAC, "Capacitor", Manufacturer_Name=Vishay, Mouser Part Number=77-VJ0603Y104JXJAC, Datasheet Link=http://www.vishay.com/docs/45226/vj31xrohsautomlcc.pdf, Height=0.97mm, Manufacturer_Part_Number=VJ0603Y104JXJAC, Mouser Price/Stock=https://www.mouser.com/Search/Refine.aspx?Keyword=77-VJ0603Y104JXJAC
CL1 CL2: library part CL10C040CB8NNNC, "Capacitor", Manufacturer_Name="Samsung Electro-Mechanics", Mouser Part Number=N/A, Arrow Part Number=CL10C040CB8NNNC, Arrow Price/Stock=https://www.arrow.com/en/products/cl10c040cb8nnnc/samsung-electro-mechanics, Datasheet Link=https://datasheet.lcsc.com/szlcsc/Samsung-Electro-Mechanics-CL10C040CB8NNNC_C307494.pdf, Height=0.9mm, Manufacturer_Part_Number=CL10C040CB8NNNC, Mouser Price/Stock=https://www.mouser.co.uk/ProductDetail/Samsung-Electro-Mechanics/CL10C040CB8NNNC?qs=X6jEic%2FHinCXvSxHicvHqA%3D%3D
D11: "Diode", Manufacturer_Name=Infineon, Mouser Part Number=726-BAS3010A-03WE6, Arrow Part Number=BAS3010A03WE6327HTSA1, Arrow Price/Stock=https://www.arrow.com/en/products/bas3010a03we6327htsa1/infineon-technologies-ag, Datasheet Link=https://www.infineon.com/dgdl/Infineon-BAS3010ASERIES-DS-v01_01-en.pdf?fileId=db3a30431ddc9372011dfbc50f231c06, Height=1.1mm, Manufacturer_Part_Number=BAS3010A03WE6327HTSA1, Mouser Price/Stock=https://www.mouser.co.uk/ProductDetail/Infineon-Technologies/BAS3010A03WE6327HTSA1?qs=K00xGehIljtEbk1%252B2pLZ%252BQ%3D%3D
FB1: library part MPZ1608S221ATA00, "Ferrite Bead", Manufacturer_Name=TDK, Mouser Part Number=810-MPZ1608S221ATA00, Arrow Part Number=MPZ1608S221ATA00, Arrow Price/Stock=https://www.arrow.com/en/products/mpz1608s221ata00/tdk, Datasheet Link=https://product.tdk.com/info/en/catalog/datasheets/beads_commercial_power_mpz1608_en.pdf, Height=0.75mm, Manufacturer_Part_Number=MPZ1608S221ATA00, Mouser Price/Stock=https://www.mouser.co.uk/ProductDetail/TDK/MPZ1608S221ATA00/?qs=pLY5GE0xrmLZeKkazChaNg%3D%3D
IC1: "Integrated Circuit", Manufacturer_Name="Texas Instruments", Mouser Part Number=595-LMZ36002RVQT, Arrow Part Number=LMZ36002RVQT, Arrow Price/Stock=https://www.arrow.com/en/products/lmz36002rvqt/texas-instruments, Datasheet Link=http://www.ti.com/lit/gpn/lmz36002, Height=2.13mm, Manufacturer_Part_Number=LMZ36002RVQT, Mouser Price/Stock=https://www.mouser.co.uk/ProductDetail/Texas-Instruments/LMZ36002RVQT?qs=kFLL9AfgRSBjXTxBMSjGOw%3D%3D
IC2: "Integrated Circuit", Manufacturer_Name=STMicroelectronics, Mouser Part Number=511-USBLC6-2SC6, Arrow Part Number=USBLC6-2SC6, Arrow Price/Stock=https://www.arrow.com/en/products/usblc6-2sc6/stmicroelectronics, Datasheet Link=http://www.st.com/st-web-ui/static/active/en/resource/technical/document/datasheet/CD00050750.pdf, Height=1.45mm, Manufacturer_Part_Number=USBLC6-2SC6, Mouser Price/Stock=https://www.mouser.co.uk/ProductDetail/STMicroelectronics/USBLC6-2SC6?qs=po45yt2pPpu%2FhNIlwQdTlg%3D%3D
IC3: "Integrated Circuit", Manufacturer_Name="Diodes Inc.", Mouser Part Number=621-AP2114H-3.3TRG1, Arrow Part Number=AP2114H-3.3TRG1, Arrow Price/Stock=https://www.arrow.com/en/products/ap2114h-3.3trg1/diodes-incorporated, Datasheet Link=http://uk.rs-online.com/web/p/products/8283528, Height=1.8mm, Manufacturer_Part_Number=AP2114H-3.3TRG1, Mouser Price/Stock=https://www.mouser.co.uk/ProductDetail/Diodes-Incorporated/AP2114H-33TRG1?qs=x6A8l6qLYDDSG%2FfwzcsOhw%3D%3D
IC4: "Integrated Circuit", Manufacturer_Name="Maxim Integrated", Mouser Part Number=700-MAX3394EEBLT, Datasheet Link=https://datasheets.maximintegrated.com/en/ds/MAX3394E-MAX3396E.pdf, Height=0.67mm, Manufacturer_Part_Number=MAX3394EEBL+T, Mouser Price/Stock=https://www.mouser.co.uk/ProductDetail/Maxim-Integrated/MAX3394EEBL%2bT?qs=LHmEVA8xxfZSpxRu22m1hw%3D%3D
IC11: "Integrated Circuit", Manufacturer_Name="Texas Instruments", Mouser Part Number=595-ISO1044BDR, Datasheet Link=http://www.ti.com/lit/gpn/iso1044?HQS=ti-null-null-sf-df-pf-sep-wwe&DCM=yes, Height=1.75mm, Manufacturer_Part_Number=ISO1044BDR, Mouser Price/Stock=https://www.mouser.co.uk/ProductDetail/Texas-Instruments/ISO1044BDR/?qs=DuoOggApuK9UGD9QQWYeTA%3D%3D
J1: library part M50-3600542R, "Connector", Manufacturer_Name=Harwin, Mouser Part Number=855-M50-3600542R, Datasheet Link=https://cdn.harwin.com/pdfs/M50-360R.pdf, Manufacturer_Part_Number=M50-3600542R, Mouser Price/Stock=https://www.mouser.co.uk/ProductDetail/Harwin/M50-3600542R?qs=DVxm2sPGGrrPu%2FxuhpV3yw%3D%3D
J2: library part 1981584-1, "Connector", Manufacturer_Name="TE Connectivity", Mouser Part Number=571-1981584-1, Arrow Part Number=1981584-1, Arrow Price/Stock=https://www.arrow.com/en/products/1981584-1/te-connectivity, Datasheet Link=http://www.te.com/commerce/DocumentDelivery/DDEController?Action=showdoc&DocId=Customer+Drawing%7F1981584%7FD2%7Fpdf%7FEnglish%7FENG_CD_1981584_D2.pdf%7F1981584-1, Height=3mm, Manufacturer_Part_Number=1981584-1, Mouser Price/Stock=https://www.mouser.co.uk/ProductDetail/TE-Connectivity/1981584-1?qs=ozkTL%2FUej0TLYxjQLPnd2Q%3D%3D
J3 J7: library part DF13A-8P-1.25H_21_, "Connector", Manufacturer_Name=Hirose, Manufacturer_Part_Number=DF13A-8P-1.25H(21), Mouser Part Number=798-DF13A8P125H21, Datasheet Link=http://uk.rs-online.com/web/p/products/7793617P, Height=3.6mm, Mouser Price/Stock=https://www.mouser.co.uk/ProductDetail/Hirose-Connector/DF13A-8P-125H21?qs=XQjbzJWzFPViW0MGk5%2FVbA%3D%3D
J4: "No Description Available", Built_By=EMA_UL_Team, Copyright="Copyright (C) 2018 Accelerated Designs. All rights reserved", Manufacturer_Part_Number=TSW-107-08-G-T-RA, RefDes=RefDes, SourceLibrary=Samtec_2016-10-07_8, Type=DEV, Vendor="Samtec Inc"
J8 J9 J10 J12: "Connector", Manufacturer_Name=Hirose, Manufacturer_Part_Number=DF13A-4P-1.25H(21), Mouser Part Number=798-DF13A4P125H21, Datasheet Link=https://componentsearchengine.com/Datasheets/1/DF13A-4P-1.25H(21).pdf, Height=3.6mm, Mouser Price/Stock=https://www.mouser.co.uk/ProductDetail/Hirose-Connector/DF13A-4P-125H21?qs=XQjbzJWzFPXWzMShI70F0w%3D%3D
LED1 LED2 LED3: library part LG_Q396-PS-35, "LED", Arrow Part Number="LG Q396-PS-35", Manufacturer_Name=OSRAM, Mouser Part Number=720-LGQ396A3964, Arrow Price/Stock=https://www.arrow.com/en/products/lgq396-ps-35/osram-opto-semiconductors, Datasheet Link=https://mouser.componentsearchengine.com/Datasheets/2/LG%20Q396-PS-35.pdf, Height=0.4mm, Manufacturer_Part_Number="LG Q396-PS-35", Mouser Price/Stock=https://www.mouser.co.uk/ProductDetail/OSRAM-Opto-Semiconductors/LG-Q396-PS-35?qs=xC%252BE9h5iuX5%252BCocujXxOpw%3D%3D
MCU1: "Integrated Circuit", Manufacturer_Name=STMicroelectronics, Mouser Part Number=511-STM32G474RBT6, Datasheet Link=https://www.mouser.com/datasheet/2/389/stm32g474cb-1600828.pdf, Height=1.6mm, Manufacturer_Part_Number=STM32G474RBT6, Mouser Price/Stock=https://www.mouser.co.uk/ProductDetail/STMicroelectronics/STM32G474RBT6?qs=uwxL4vQweFP0uAZUZXLBhQ%3D%3D
R1 R2 R13 R21 R22: library part MCT06030C1002FP500, "Resistor", Manufacturer_Name=Vishay, Mouser Part Number=594-MCT06030C1002FP5, Datasheet Link=http://www.vishay.com/docs/28705/mcx0x0xpro.pdf, Height=0.55mm, Manufacturer_Part_Number=MCT06030C1002FP500, Mouser Price/Stock=https://www.mouser.co.uk/ProductDetail/Vishay-Beyschlag/MCT06030C1002FP500?qs=Wvg1umJc15zoHgIjwqoGHw%3D%3D
R3 R4 R5: library part MCT06030C1001FP500, "Resistor", Manufacturer_Name=Vishay, Mouser Part Number=594-MCT06030C1001FP5, Datasheet Link=http://www.vishay.com/docs/28705/mcx0x0xpro.pdf, Height=0.55mm, Manufacturer_Part_Number=MCT06030C1001FP500, Mouser Price/Stock=https://www.mouser.co.uk/ProductDetail/Vishay-Beyschlag/MCT06030C1001FP500?qs=7ZE6F4QMOBbsjeUdqW8cwA%3D%3D
R17: library part ERJPA3J121V, "Resistor", Manufacturer_Name=Panasonic, Datasheet Link=https://industrial.panasonic.com/cdbs/www-data/pdf/RDA0000/AOA0000C243.pdf, Height=0.55mm, Manufacturer_Part_Number=ERJPA3J121V
RADJ1: library part RT0805BRD075K05L, "Resistor", Manufacturer_Name=Yageo, Mouser Part Number=603-RT0805BRD075K05L, Datasheet Link=https://www.mouser.at/datasheet/2/447/PYu-RT_1-to-0.01_RoHS_L_11-1669912.pdf, Height=0.7mm, Manufacturer_Part_Number=RT0805BRD075K05L, Mouser Price/Stock=https://www.mouser.at/ProductDetail/Yageo/RT0805BRD075K05L?qs=bQfrgN9vNvwObDVrZ%2FDM5w%3D%3D
RT1: library part ERJ-6ENF4992V, "Resistor", Manufacturer_Name=Panasonic, Mouser Part Number=667-ERJ-6ENF4992V, Datasheet Link=https://industrial.panasonic.com/cdbs/www-data/pdf/RDA0000/AOA0000C84.pdf, Height=0.7mm, Manufacturer_Part_Number=ERJ-6ENF4992V, Mouser Price/Stock=https://www.mouser.com/Search/Refine.aspx?Keyword=667-ERJ-6ENF4992V
S1: "Switch", Manufacturer_Name="Copal Electronics", Datasheet Link=https://www.nidec-copal-electronics.com/e/catalog/switch/cas.pdf, Height=2.5mm, Manufacturer_Part_Number=CAS-D20A1
SB1 SB2: Manufacturer=YAGEO, Manufacturer_Part_Number=RC0603JR-070RL, Package=SB0603, ComponentLink1Description=Datasheet, ComponentLink1URL=http://tunmcdsvn.tun.st.com/Component_Datasheet_Library/Trunk/Resistors/Yageo_Resistor_RC0603-series, ECCN_EU=n/a, ECCN_US=n/a, Internal_Part_Number=MCD-00071, Part_Type=Mechanical, Provided_By=SUBCO, Status=Released
SW2: library part PTS_647_SK38_SMTR2_LFS, "Switch", Arrow Part Number="PTS 647 SK38 SMTR2 LFS", Manufacturer_Name="C & K COMPONENTS", Arrow Price/Stock=https://www.arrow.com/en/products/pts-647-sk38-smtr2-lfs/ck, Datasheet Link=https://dznh3ojzb2azq.cloudfront.net/products/Tactile/PTS647/documents/datasheet.pdf, Height=3.8mm, Manufacturer_Part_Number="PTS 647 SK38 SMTR2 LFS"
Y1: "Crystal or Oscillator", Manufacturer_Name=ABRACON, Mouser Part Number=815-8W16-8B1UT, Arrow Part Number=ABM8W-16.0000MHZ-8-B1U-T3, Arrow Price/Stock=https://www.arrow.com/en/products/abm8w-16.0000mhz-8-b1u-t3/abracon, Datasheet Link=https://abracon.com/Resonators/ABM8W.pdf, Height=0.75mm, Manufacturer_Part_Number=ABM8W-16.0000MHZ-8-B1U-T3, Mouser Price/Stock=https://www.mouser.co.uk/ProductDetail/ABRACON/ABM8W-160000MHZ-8-B1U-T3?qs=5aG0NVq1C4zuwTHNFUIcqw%3D%3D

## Free pads (board coordinates)
  round 6 hole 3.4: 6(41.5,3.5) 7(3.5,3.5) 8(3.5,41.5) 9(41.5,41.5)
  round 1 smd: 10(23.749,24.638) 11(21.844,24.638) 12(26.035,24.638)

## Via types
v1: diameter 0.6, hole 0.3, Top Layer to Bottom Layer, tented both sides, 123 vias
v2: diameter 0.85, hole 0.45, Top Layer to Bottom Layer, tented both sides, 26 vias
v3: diameter 0.6, hole 0.3, Top Layer to Bottom Layer, 10 vias

## Nets (pads, with @x,y where several pads share a name; then routed paths per layer and width w, separated by ;. In a path a pad name is that pad's centre, name@x,y a point inside that pad or via, vN(x,y) a via of type N, cw(c..) or ccw(c..) an arc to the next point about the centre after c; other vN are vias at no path point)
3V3: C5.1 C8.1 C9.1 C10.1 C11.1 C33.1 FB1.1 IC2.5 IC3.2 IC3.4 IC4.A1 IC4.B1 IC11.1 J1.1 J8.4 J10.1 J12.4 MCU1.16 MCU1.32 MCU1.48 MCU1.64 pad.10 R13.1 R21.1 R22.1 S1.1 S1.4 | length 39.6
  Top Layer w0.2: IC4.A1 IC4.B1 18.161,34.671 18.586,34.246 21.8,34.246 v2(21.844,34.29) ; pad.10 23.78,24.669 23.78,26.193 IC3.2@24.13,26.543
  Top Layer w0.3: v1(13.208,9.525) C11.1 13.448,10.716 13.764,10.716 14.248,11.2 14.248,12.505 14.249,12.506 MCU1.48 ; FB1.1 v2(13.208,24.003) C8.1 13.4,22.479 16.823,22.479 16.824,22.478 MCU1.32 ; v1(18.161,6.858) 18.176,6.843 18.176,5.436 J10.1 ; MCU1.64 24.324,9.931 24.325,9.93 24.868,9.93 25.084,9.714 C10.1 25.051,8.73 25.051,7.779 v1(25.019,7.747) ; MCU1.16 26.899,20.006 26.9,20.007 26.9,21.098 27.075,21.274 C9.1 28.259,21.209 v1(29.21,21.209) ; v1(26.924,6.35) 26.924,5.361 S1.1 ; S1.4 30.734,5.361 v1(30.734,6.35) ; R13.1 v1(36.195,10.795)
  Top Layer w0.4: v1(6.858,15.748) R22.1 R21.1 ; C33.1 10.013,29.018 IC11.1 10.052,29.019 10.052,27.921 10.287,27.686 v1(10.287,27.178)
  Bottom Layer w0.3: J8.4 5.436,14.209 6.843,14.209 v1(6.858,14.224) ; v1(18.161,6.858) 18.176,6.843 18.176,5.436 J12.4
  other v1: 8.255,2.135 10.668,12.349
  other v2: 21.844,30.861 22.987,30.861 25.273,30.861 26.416,30.861 17.949,31.665 19.473,31.665 21.844,32.004 26.416,32.004 21.844,33.147 26.416,33.147 22.987,34.29 24.13,34.29 25.273,34.29 26.416,34.29
+5: C4.1 C6.1 D11.1 IC1.7 IC1.13 IC1.14 IC1.15 IC1.16 IC1.17 IC1.18 IC1.22 IC1.43 IC3.3 IC4.C1 J3.1 J4.2 J4.5 J4.8 J4.11 J4.14 J4.17 J4.20 J7.8 pad.12 SB2.1 | length 12.8
  Top Layer w0.2: IC4.C1 20.709,35.568 v1(22.733,37.592) ; pad.12 26.08,24.683 26.08,26.207 IC3.3@26.416,26.543
  Top Layer w0.3: v1(1.905,18.923) D11.1
  Top Layer w0.381: IC1.22@34.18,22.549 34.188,22.557 34.188,23.266 v1(34.586,23.664) ; IC1.7 36.538,33.49 v2(36.599,33.551)
  Top Layer w0.5: v1(7.62,39.37) SB2.1
  Top Layer w0.6: v1(4.699,32.442) v1(6.094,32.442)
  other v1: 27.432,26.035 31.369,26.543 27.432,27.073 31.369,27.432 26.416,27.94 27.432,27.94 31.369,28.47 31.369,29.337
AGND: C6.2 C7.2 IC1.1 IC1.2 IC1.3 IC1.4 IC1.5 IC1.8 IC1.11 IC1.12 MCU1.27 RADJ1.2 RT1.2 | length 4.4
  Top Layer w0.3: MCU1.27 19.324,23.731 C7.2 v1(20.701,24.003)
  Top Layer w0.381: v2(32.766,20.066) RADJ1.2 RADJ1.2@33.89,20.108
  other v1: 28.321,33.02 29.337,33.02 30.353,33.02
  other v2: 43.688,30.988 43.688,32.385 38.481,33.782 39.878,33.782 43.688,33.782
NetC34_1: C34.1 IC11.7 J9.2 SB1.2 | length 9
  Top Layer w0.5: SB1.2 10.795,40.64 11.303,40.132 v1(11.303,37.719) 11.284,37.7 11.284,36.238 C34.1 11.272,36.164 11.272,34.493 IC11.7
  Bottom Layer w0.5: v1(11.303,37.719) 11.308,37.724 11.308,39.532 J9.2
NetC34_2: C34.2 IC11.8 J9.1 SB2.2 | length 6.9
  Top Layer w0.5: IC11.8 9.958,34.537 9.958,36.078 C34.2 9.981,36.335 9.981,36.825 10.033,36.877 v1@10.033,37.673 ; v1(10.033,37.719) SB2.2
  Bottom Layer w0.5: v1(10.033,37.719) 10.048,37.734 10.048,39.522 J9.1
NetD11_2: D11.2 J2.1 | length 6
  Top Layer w0.261: J2.1 4.674,13.619 5.202,14.147 D11.2
NetIC4_C2: IC4.C2 J4.6 | length 4.7
  Top Layer w0.2: IC4.C2 20.447,36.068 21.463,37.084 J4.6
NetIC4_C3: IC4.C3 J4.3 | length 2.1
  Top Layer w0.2: IC4.C3 18.661,37.076 18.923,37.338 J4.3
NetIC11_5: IC11.5 J9.4 R17.1 | length 5.2
  Top Layer w0.3: v1(13.843,37.719) 13.843,36.36 R17.1
  Top Layer w0.5: IC11.5 13.918,34.537 13.918,36.105 R17.1
  Bottom Layer w0.3: J9.4 13.828,39.522 13.828,37.734 v1(13.843,37.719)
NetIC11_6: IC11.6 J9.3 R17.2 | length 5.2
  Top Layer w0.3: R17.2 12.573,36.36 v1(12.573,37.719)
  Top Layer w0.5: R17.2 12.498,36.105 12.498,34.537 IC11.6
  Bottom Layer w0.3: J9.3 12.568,39.532 12.568,37.724 v1(12.573,37.719)
NetLED1_2: LED1.2 R3.2 | length 1.4
  Top Layer w0.2: LED1.2 LED1.2@33.147,14.484
  Top Layer w0.3: LED1.2@33.147,14.484 R3.2
NetLED2_2: LED2.2 R4.2 | length 1.4
  Top Layer w0.3: LED2.2 R4.2
NetLED3_2: LED3.2 R5.2 | length 1.4
  Top Layer w0.3: LED3.2 R5.2
NetR1_1: R1.1 S1.2 | length 6.1
  Top Layer w0.3: S1.2 28.575,3.556 28.956,3.937 28.956,5.969 29.591,6.604 29.591,7.582 R1.1
NetR2_1: R2.1 S1.5 | length 8.8
  Top Layer w0.3: R2.1 30.861,9.144 32.258,7.747 32.258,3.937 31.877,3.556 S1.5
PGND: C1.2 C2.2 C3.2 C4.2 C5.2 C8.2 C9.2 C10.2 C11.2 C12.2 C33.2 CL1.1 CL2.1 IC1.19 IC1.29 IC1.30 IC1.31 IC1.32 IC1.33 IC1.41 IC2.2 IC3.1 IC4.B3 IC11.4 J1.3 J1.5 J1.9 J2.5 J3.8 J4.1 J4.4 J4.7 J4.10 J4.13 J4.16 J4.19 J7.1 J8.1 J10.4 J12.1 LED1.1 LED2.1 LED3.1 MCU1.15 MCU1.31 MCU1.47 MCU1.63 P2.1 pad.6 pad.7 pad.8 pad.9 pad.11 S1.3 S1.6 SB1.1 SW2.3 SW2.4 Y1.2 Y1.4 | length 62.9
  Top Layer w0.2: v1(17.653,37.592) 18.142,37.103 18.142,36.587 IC4.B3 ; pad.11 IC3.1@21.844,26.416
  Top Layer w0.3: J2.5 6.253,11.019 v1(6.858,10.414) ; C33.2 13.651,30.418 13.843,30.226 IC11.4 v1(13.843,27.178) ; C11.2 v1(13.208,12.827) 13.289,12.827 13.468,13.006 MCU1.47 ; v1(13.208,20.32) C8.2 14.543,21.271 15.113,20.701 17.018,20.701 17.323,21.006 17.323,21.993 MCU1.31 ; J10.4 21.956,5.436 21.956,6.843 v1(21.971,6.858) ; v1(23.749,7.747) 23.716,7.78 23.716,8.731 C10.2 23.823,8.902 MCU1.63@23.823,10.517 ; MCU1.15 26.313,19.507 27.194,19.507 27.43,19.742 28.062,19.742 28.386,20.066 v1(29.21,20.066) ; S1.3 27.007,1.778 v1(28.321,1.778) ; v1(27.686,11.938) CL1.1 Y1.4 ; v1(29.337,1.778) 30.651,1.778 S1.6 ; Y1.2 CL2.1 v1(30.734,17.526) ; v1@33.146,11.939 LED1.1@33.146,12.981 ; v1(34.671,11.938) LED2.1 ; C12.2 v1(36.068,9.398) ; v1(36.195,11.938) LED3.1 ; MCU1.63@23.823,10.517 MCU1.63
  Top Layer w0.5: v1(7.62,40.64) SB1.1
  Top Layer w0.6: v1(4.677,23.692) v1(6.094,23.692) ; v1(27.686,10.922) v1(29.591,10.922) v1(31.496,10.922) v1(31.496,18.542) v1(29.591,18.542) v1(27.686,18.542)
  Bottom Layer w0.3: J8.1 5.436,10.429 6.843,10.429 v1(6.858,10.414) ; J12.1 21.956,5.436 21.956,6.843 v1(21.971,6.858)
  other v1: 36.906,1.82 9.525,2.135 10.795,2.135 13.335,2.135 36.906,7.07 10.668,9.749 33.147,11.938 43.942,12.065 31.496,12.827 43.942,12.954 43.942,13.843 31.496,14.732 43.942,15.24 43.942,16.129 31.496,16.637 43.942,17.018 43.942,18.415 43.942,19.304 43.942,20.193 27.559,22.987 27.559,23.876 27.559,24.765
  other v2: 17.949,26.331 19.219,26.331 20.489,26.331
  other v3: 35.306,26.797 36.322,26.797 37.338,26.797 38.354,26.797 39.37,26.797 35.306,28.067 36.322,28.067 37.338,28.067 38.354,28.067 39.37,28.067
RT: IC1.9 RT1.1 | length 4.2
  Top Layer w0.2: IC1.9 34.938,34.557 35.687,35.306 RT1.1
RTSEL: IC1.10
STM32-BOOT: MCU1.61 R1.2 | length 8.9
  Top Layer w0.3: MCU1.61 22.824,7.275 23.241,6.858 25.654,6.858 26.416,7.62 R1.2
STM32-CAN-TRCV-RX: IC11.3 MCU1.34 | length 12.7
  Top Layer w0.3: IC11.3 12.573,25.654 11.811,24.892 11.811,19.812 12.117,19.506 MCU1.34
STM32-CAN-TRCV-TX: IC11.2 MCU1.59 | length 24.2
  Top Layer w0.3: v1(11.303,27.178) IC11.2 ; MCU1.59 MCU1.59 21.825,12.173 v1(21.844,12.192)
  Bottom Layer w0.3: v1(11.303,27.178) 11.303,20.574 19.685,12.192 v1(21.844,12.192)
STM32-I2C-CON-SCL: J8.2 MCU1.42 R21.2 | length 12
  Top Layer w0.3: R21.2 11.049,14.224 12.331,15.506 MCU1.42
  Bottom Layer w0.3: J8.2 6.868,11.694 9.398,14.224 v1(10.541,14.224)
STM32-I2C-CON-SDA: J8.3 MCU1.41 R22.2 | length 11.7
  Top Layer w0.3: R22.2 11.684,15.748 11.942,16.006 MCU1.41
  Bottom Layer w0.3: J8.3 6.848,12.944 9.652,15.748 v1(10.541,15.748)
STM32-LED1: MCU1.8 R3.1 | length 24.1
  Top Layer w0.2: v1(24.13,14.224) 24.13,15.367 24.765,16.002 MCU1.8@26.416,16.002
  Top Layer w0.3: R3.1 v1(33.147,18.415)
  Bottom Layer w0.2: v1(24.13,14.224) 24.13,12.827 26.924,10.033 32.268,10.033 32.385,10.15 32.385,17.653 v1(33.147,18.415)
STM32-LED2: MCU1.9 R4.1 | length 27.7
  Top Layer w0.2: v1(23.241,14.224) 23.241,15.494 24.257,16.51 MCU1.9@26.416,16.51
  Top Layer w0.3: R4.1 v1(34.671,18.415)
  Bottom Layer w0.2: v1(23.241,14.224) 23.241,12.954 26.67,9.525 32.639,9.525 33.909,10.795 33.909,17.653 v1(34.671,18.415)
STM32-LED3: MCU1.10 R5.1 | length 31.2
  Top Layer w0.2: v1(22.352,14.224) 22.352,15.621 23.749,17.018 MCU1.10@26.416,17.018
  Top Layer w0.3: R5.1 v1(36.195,18.415)
  Bottom Layer w0.2: v1(22.352,14.224) 22.352,13.081 26.416,9.017 33.02,9.017 35.433,11.43 35.433,17.653 v1(36.195,18.415)
STM32-NRST: C12.1 J1.10 MCU1.7 R13.2 SW2.2 | length 42.3
  Top Layer w0.2: MCU1.7 25.158,15.506 25.019,15.367 25.019,12.065 27.051,10.033 31.242,10.033 31.877,9.398 C12.1
  Top Layer w0.3: R13.2 33.667,10.745 33.667,9.448 C12.1 33.717,7.081 SW2.2 33.782,6.994 v1(33.782,5.461)
  Bottom Layer w0.3: v1(13.335,5.485) 15.851,5.485 18.288,3.048 21.971,3.048 23.749,4.826 33.147,4.826 v1(33.782,5.461)
STM32-RC-CON-1: J12.3 MCU1.54 | length 5.2
  Top Layer w0.3: MCU1.54 19.324,8.824 19.501,8.648 19.501,8.312 v1(19.558,8.255)
  Bottom Layer w0.3: J12.3 19.441,7.355 19.558,7.472 v1(19.558,8.255)
STM32-RC-CON-2: J12.2 MCU1.55 | length 5.5
  Top Layer w0.3: MCU1.55 19.825,10.517 19.825,9.131 20.262,8.694 20.262,7.932 v1(20.701,7.493)
  Bottom Layer w0.3: J12.2 20.696,5.426 20.696,7.488 v1(20.701,7.493)
STM32-RC-CON-3: J4.9 MCU1.18 | length 37.1
  Top Layer w0.2: v1(22.86,18.796) 22.86,19.558 23.824,20.522 MCU1.18
  Bottom Layer w0.2: v1(22.86,18.796) 22.86,17.907 22.606,17.653 18.546,17.653 15.494,20.705 15.494,32.639 19.558,36.703 23.676,36.703 24.003,37.03 J4.9
STM32-RC-CON-4: J4.12 MCU1.19 | length 37.7
  Top Layer w0.2: v1(21.971,18.796) 21.971,19.304 23.324,20.657 MCU1.19
  Bottom Layer w0.2: v1(21.971,18.796) 21.971,18.161 21.844,18.034 18.704,18.034 15.875,20.863 15.875,32.512 19.685,36.322 26.162,36.322 26.543,36.703 J4.12
STM32-RC-CON-5: J4.15 MCU1.20 | length 37.8
  Top Layer w0.2: v1(21.082,18.796) 21.082,19.05 22.824,20.792 MCU1.20
  Bottom Layer w0.2: v1(21.082,18.796) 18.48,18.796 16.256,21.02 16.256,32.385 19.812,35.941 28.702,35.941 29.083,36.322 J4.15
STM32-RC-CON-6: J4.18 MCU1.21 | length 38.1
  Top Layer w0.2: v1(20.193,19.685) 21.082,19.685 22.324,20.927 MCU1.21
  Bottom Layer w0.2: v1(20.193,19.685) 18.13,19.685 16.637,21.178 16.637,32.258 19.939,35.56 31.242,35.56 31.623,35.941 J4.18
STM32-RC-CON-7: J4.21 MCU1.22 | length 38.7
  Top Layer w0.2: v1(20.193,20.574) 21.336,20.574 21.824,21.062 MCU1.22
  Bottom Layer w0.2: v1(20.193,20.574) 17.78,20.574 17.018,21.336 17.018,32.131 20.066,35.179 33.782,35.179 34.163,35.56 J4.21
STM32-RC-LVS-1: IC4.A2 MCU1.17 | length 31.8
  Top Layer w0.2: v1(16.002,35.179) 16.891,36.068 IC4.A2 ; v1(23.749,18.796) 23.749,19.812 24.324,20.387 MCU1.17
  Bottom Layer w0.2: v1(16.002,35.179) 15.113,34.29 15.113,20.547 18.388,17.272 23.368,17.272 23.749,17.653 v1(23.749,18.796)
STM32-RC-LVS-2: IC4.A3 MCU1.14 | length 33
  Top Layer w0.2: v1(15.367,35.814) 16.121,36.568 IC4.A3 ; v1(24.638,18.796) 25.146,18.796 25.356,19.006 MCU1.14
  Bottom Layer w0.2: v1(15.367,35.814) 14.732,35.179 14.732,20.389 18.23,16.891 24.13,16.891 24.638,17.399 v1(24.638,18.796)
STM32-SPI-CON-CS0: J3.2 J7.7 MCU1.38 | length 20.4
  Top Layer w0.261: v1(9.525,19.812) 9.525,18.923 10.942,17.506 MCU1.38
  Bottom Layer w0.261: J7.7@6.096,31.115 6.173,31.192 7.416,31.192 9.525,29.083 v1(9.525,19.812)
  other v1: 6.094,31.192
STM32-SPI-CON-CS1: J3.3 J7.6 MCU1.39 | length 19.8
  Top Layer w0.261: v1(8.636,19.812) 8.636,19.05 10.66,17.026 14.114,17.026 14.116,17.024 14.818,17.024 MCU1.39
  Bottom Layer w0.261: v1(6.094,29.942) 7.396,29.942 8.636,28.702 v1(8.636,19.812)
STM32-SPI-CON-CS2: J3.4 J7.5 MCU1.40 | length 19.1
  Top Layer w0.261: v1(7.747,19.812) 7.747,19.177 10.414,16.51 12.954,16.51 12.958,16.506 MCU1.40
  Bottom Layer w0.261: v1(6.094,28.692) 7.376,28.692 7.747,28.321 v1(7.747,19.812)
STM32-SPI-CON-MISO: J3.7 J7.2 MCU1.36 | length 12.7
  Top Layer w0.3: v1(6.094,24.942) 7.443,24.942 8.636,23.749 8.636,22.479 10.795,20.32 10.795,19.304 11.593,18.506 MCU1.36
STM32-SPI-CON-MOSI: J3.6 J7.3 MCU1.37 | length 18.4
  Top Layer w0.3: v1(6.094,26.192) 4.856,26.192 3.81,25.146 3.81,23.241 5.715,21.336 9.017,21.336 10.287,20.066 10.287,19.05 11.331,18.006 MCU1.37
STM32-SPI-CON-SCK: J3.5 J7.4 MCU1.35 | length 14.5
  Top Layer w0.3: v1(6.094,27.442) 7.356,27.442 9.525,25.273 9.525,22.352 11.303,20.574 11.303,19.558 11.855,19.006 MCU1.35
STM32-SW1-2: MCU1.62 R2.2 | length 7.1
  Top Layer w0.3: MCU1.62 23.324,11.64 23.622,11.938 24.384,11.938 27.178,9.144 R2.2
STM32-SWCLK: J1.4 MCU1.50 | length 11.4
  Top Layer w0.3: J1.4 9.7,5.66 9.7,7.089 9.876,7.264 15.265,7.264 17.324,9.323 MCU1.50
STM32-SWDIO: J1.2 MCU1.49 | length 12.2
  Top Layer w0.3: J1.2 8.327,5.557 8.327,7.184 8.915,7.772 15.011,7.772 16.824,9.585 MCU1.49
STM32-SWO: J1.6 MCU1.56 | length 15.8
  Top Layer w0.3: MCU1.56 20.324,9.394 20.701,9.017 v1(21.59,9.017)
  Bottom Layer w0.3: v1(10.795,5.485) 10.795,7.239 11.43,7.874 15.113,7.874 16.256,9.017 v1(21.59,9.017)
STM32-UART-CON-RX: J10.3 MCU1.53 | length 5.9
  Top Layer w0.3: MCU1.53 18.824,7.973 20.491,6.306 20.491,5.621 J10.3
STM32-UART-CON-TX: J10.2 MCU1.52 | length 5.6
  Top Layer w0.3: MCU1.52 18.324,7.711 19.44,6.595 19.44,5.422 J10.2
STM32-VDDA: C7.1 FB1.2 MCU1.28 MCU1.29 | length 4.3
  Top Layer w0.3: FB1.2 C7.1 18.324,23.675 MCU1.29 MCU1.28
STM32-XC_IN: CL1.2 MCU1.5 Y1.1 | length 6.5
  Top Layer w0.2: MCU1.5 27.46,14.506 27.686,14.732 29.845,14.732 30.01,14.567 Y1.1 CL1.2
STM32-XC_OUT: CL2.2 MCU1.6 Y1.3 | length 4.2
  Top Layer w0.2: MCU1.6 27.325,15.006 27.551,15.232 27.935,15.232 28.41,15.707 Y1.3 CL2.2
USB-Con-D_N: IC2.1 J2.2 | length 9.2
  Top Layer w0.261: J2.2 4.268,12.9 5.047,12.9 5.071,12.876 6.021,12.876 8.128,10.769 8.128,9.555 8.939,8.745 9.808,8.745 9.961,8.898 9.961,9.114 9.887,9.187 9.887,9.58 IC2.1
USB-Con-D_P: IC2.3 J2.3 | length 10.8
  Top Layer w0.261: J2.3 4.268,12.388 5.047,12.388 5.071,12.412 5.828,12.412 7.664,10.576 7.664,9.363 8.746,8.28 10.062,8.28 10.625,8.843 11.256,8.843 11.449,9.036 11.449,9.58 IC2.3
USB-D_N: IC2.6 MCU1.45 | length 6.2
  Top Layer w0.261: IC2.6 9.872,12.503 9.872,13.102 10.025,13.255 10.994,13.255 11.728,13.988 14.818,13.988 MCU1.45
USB-D_P: IC2.4 MCU1.46 | length 4.3
  Top Layer w0.261: IC2.4 11.559,12.408 11.559,13.163 11.92,13.524 14.818,13.524 MCU1.46
VADJ: IC1.24 RADJ1.1 | length 2.4
  Top Layer w0.381: IC1.24 35.738,20.076 RADJ1.1
Vcc: C1.1 C2.1 C3.1 IC1.26 IC1.27 IC1.28 IC1.42 P1.1
  other v1: 38.608,12.065 38.608,12.954 38.608,13.97 38.608,15.24 38.608,16.129 38.608,17.018 38.608,18.415 38.608,19.304 38.608,20.193
pads on no net: IC1.6 IC1.20 IC1.21 IC1.23 IC1.25 IC1.34 IC1.35 IC1.36 IC1.37 IC1.38 IC1.39 IC1.40 J1.7 J1.8 J2.4 J2.6 J2.7 J2.8 J2.9 J2.10 J2.11 J3.MP1 J3.MP2 J7.MP1 J7.MP2 J8.MP1 J8.MP2 J9.MP1 J9.MP2 J10.MP1 J10.MP2 J12.MP1 J12.MP2 MCU1.1 MCU1.2 MCU1.3 MCU1.4 MCU1.11 MCU1.12 MCU1.13 MCU1.23 MCU1.24 MCU1.25 MCU1.26 MCU1.30 MCU1.33 MCU1.43 MCU1.44 MCU1.51 MCU1.57 MCU1.58 MCU1.60 SW2.1

## Polygon pours and split planes (outlines as drawn)
PGND on Mid Layer 1 "PGND_L02_P000" (solid, pour order 0): 45,0 0,0 0,45 45,45
3V3 on Mid Layer 2 "3V3_L03_P001" (solid, pour order 1): 27.559,28.956 25.146,28.956 25.146,21.844 45,21.844 45,0 0,0 0,7.027 7.027,7.027 7.027,34.925 27.559,34.925
+5 on Mid Layer 2 "+5_L03_P002" (solid, pour order 2): 45,44.873 0,44.873 0,7.366 6.646,7.366 6.646,35.348 27.927,35.348 27.927,28.575 25.527,28.575 25.527,22.225 45,22.225
3V3 on Top Layer "3V3_L01_P003" (solid, pour order 3): 27.559,34.925 27.559,28.956 25.146,28.956 25.146,25.273 23.114,25.273 23.114,28.956 17.145,28.956 17.145,34.925
+5 on Top Layer "+5_L01_P004" (solid, pour order 4): 34.238,25.579 25.527,25.579 25.527,28.575 27.927,28.575 27.927,29.959 27.94,29.972 28.05,30.082 34.238,30.082
PGND on Top Layer "PGND_L01_P005" (solid, pour order 5): 22.733,28.575 17.145,28.575 17.145,25.738 17.61,25.273 22.733,25.273
AGND on Top Layer "AGND_L01_P006" (solid, pour order 6): 45.002,34.914 45,37.114 37.241,37.114 35.041,34.914 27.927,34.914 27.927,30.382 45,30.382
PGND on Top Layer "PGND_L01_P007" (solid, pour order 7): 41.529,11.557 41.529,9.271 44.971,9.271 45,9.3 45,11.6 45,30.099 34.838,30.099 34.838,25.282 27.051,25.282 27.051,22.479 31.623,22.479 31.623,24.782 39.488,24.782 39.488,21.844 41.529,21.844
Vcc on Top Layer "VCC_L01_P008" (solid, remove dead copper, pour order 8): 37.085,9.651 39.749,6.987 44.958,6.985 45,7.027 45,9 44.983,9.017 41.021,9.017 41.021,21.463 39.188,21.463 39.188,24.382 37.088,24.382 37.088,11.557
PGND on Bottom Layer "PGND_L04_P009" (solid, pour order 9): 41.529,11.811 41.529,9.271 44.971,9.271 45,9.3 45,11.6 45,30.099 34.838,30.099 34.838,21.844 41.529,21.844
Vcc on Bottom Layer "VCC_L04_P010" (solid, pour order 10): 37.084,9.652 39.751,6.985 44.704,6.985 44.704,9.017 41.021,9.017 41.021,11.557 41.021,21.463 37.084,21.463 37.084,11.557
AGND on Bottom Layer "AGND_L04_P011" (solid, pour order 11): 45,34.914 45,37.114 37.241,37.114 35.041,34.914 27.927,34.914 27.927,30.382 30.141,30.382 30.141,25.273 18.034,25.273 18.034,21.082 30.141,21.082 30.141,19.366 36.618,19.366 36.618,21.505 34.28,21.505 34.28,30.382 45,30.382

## Keep-outs
Mid Layer 1:
  lines w0.05: 26.289,14.224 27.051,14.224 27.051,10.287 32.131,10.287 32.131,19.177 27.051,19.177 27.051,15.24 26.289,15.24

## Silkscreen, mask and mechanical layers (free items; w line width, h text height)
Top Overlay:
  lines w0.15: 15.875,7.112 15.875,6.604 16.383,6.096 ; 16.129,6.096 16.383,6.096 ; 16.383,6.35 16.383,6.096
  text "GND" at 14.351,43.053 h0.9
  text "mod" at 7.493,42.545 h0.9
  text "FOC" at 10.16,42.418 h0.9
  text "+5V" at 14.351,40.513 h0.9
  text "Sig" at 14.478,37.846 h0.9
  text "SPI" at 1.905,36.449 h0.9
  text "Powerstage" at 7.62,25.019 h0.9
  text "<-" at 7.62,24.003 h0.9
  text "G" at 21.336,22.86 h0.9
  text "3V3" at 22.352,22.86 h0.9
  text "5V" at 25.146,22.86 h0.9
  text "USB" at 6.223,13.589 h0.9 r270
  text "-" at 41.402,9.83 h0.9
  text "+" at 17.653,8.382 h0.9 r270
  text "+" at 41.427,7.544 h0.9
  text "SWD" at 9.525,7.493 h0.9
  text "UART" at 13.462,7.493 h0.9
  text "-" at 21.463,7.493 h0.9
  text "Vin / 3-12S" at 40.386,6.985 h0.9 r90
Bottom Overlay:
  lines w0.3: 20.694,23.058 ccw(c23.234,23.058) 21.034,21.788 ccw(c23.234,23.058) 21.964,20.858 ccw(c23.234,23.058) 23.234,20.518 ccw(c23.234,23.058) 24.504,20.858 ccw(c23.234,23.058) 25.433,21.788 ccw(c23.234,23.058) 25.774,23.058 ccw(c23.234,23.058) 25.433,24.328 ccw(c23.234,23.058) 24.504,25.257 ccw(c23.234,23.058) 23.234,25.598 ccw(c23.234,23.058) 21.964,25.257 ccw(c23.234,23.058) 21.034,24.328 ccw(c23.234,23.058) 20.694,23.058
  lines w0.4: 20.191,21.775 17.781,20.383 cw(c17.654,20.603) 17.428,20.488 cw(c28.737,26.257) 16.827,21.86 ccw(c16.757,21.835) 16.741,21.906 16.521,21.855 ccw(c16.545,21.753) 16.447,21.717 ccw(c28.737,26.257) 17.363,19.754 17.437,19.626 ccw(c28.756,26.224) 18.68,17.851 ccw(c18.76,17.917) 18.835,17.846 18.99,18.01 ccw(c18.936,18.061) 18.993,18.108 cw(c28.756,26.224) 18.105,19.314 cw(c18.318,19.453) 18.191,19.673 20.601,21.064 ; 20.191,24.341 17.781,25.732 ccw(c17.654,25.512) 17.428,25.628 ccw(c28.737,19.858) 16.827,24.255 cw(c16.757,24.281) 16.741,24.209 16.521,24.261 cw(c16.545,24.362) 16.447,24.398 cw(c28.737,19.858) 17.363,26.361 17.437,26.49 cw(c28.756,19.892) 18.68,28.265 cw(c18.76,28.198) 18.835,28.27 18.99,28.105 cw(c18.936,28.055) 18.993,28.008 ccw(c28.756,19.892) 18.105,26.801 ccw(c18.318,26.663) 18.191,26.443 20.601,25.051 ; 22.824,19.781 22.824,16.998 cw(c22.57,16.998) 22.556,16.744 cw(c23.214,29.423) 21.067,16.91 ccw(c21.055,16.838) 20.984,16.859 20.919,16.643 ccw(c21.019,16.613) 21.001,16.51 ccw(c23.214,29.423) 23.16,16.322 23.308,16.322 ccw(c23.253,29.423) 25.466,16.51 ; 22.824,26.334 22.824,29.117 ccw(c22.57,29.117) 22.556,29.371 ccw(c23.214,16.692) 21.067,29.205 cw(c21.055,29.278) 20.984,29.257 20.919,29.473 cw(c21.019,29.503) 21.001,29.605 cw(c23.214,16.692) 23.16,29.794 23.308,29.794 cw(c23.253,16.692) 25.466,29.605 ; 23.644,19.781 23.644,16.998 ccw(c23.898,16.998) 23.911,16.744 ccw(c23.253,29.423) 25.4,16.91 cw(c25.413,16.838) 25.483,16.859 25.548,16.643 cw(c25.449,16.613) 25.466,16.51 ; 23.644,26.334 23.644,29.117 cw(c23.898,29.117) 23.911,29.371 cw(c23.253,16.692) 25.4,29.205 ccw(c25.413,29.278) 25.483,29.257 25.548,29.473 ccw(c25.449,29.503) 25.466,29.605 ; 25.866,21.064 28.277,19.673 cw(c28.15,19.453) 28.363,19.314 cw(c17.712,26.224) 27.474,18.108 ccw(c27.531,18.061) 27.477,18.01 27.632,17.846 ccw(c27.708,17.917) 27.788,17.851 ccw(c17.712,26.224) 29.03,19.626 29.104,19.754 ccw(c17.731,26.257) 30.02,21.717 ccw(c29.923,21.753) 29.947,21.855 29.727,21.906 ccw(c29.71,21.835) 29.641,21.86 cw(c17.731,26.257) 29.04,20.488 cw(c28.814,20.603) 28.687,20.383 26.276,21.775 ; 25.866,25.051 28.277,26.443 ccw(c28.15,26.663) 28.363,26.801 ccw(c17.712,19.892) 27.474,28.008 cw(c27.531,28.055) 27.477,28.105 27.632,28.27 cw(c27.708,28.198) 27.788,28.265 cw(c17.712,19.892) 29.03,26.49 29.104,26.361 cw(c17.731,19.858) 30.02,24.398 cw(c29.923,24.362) 29.947,24.261 29.727,24.209 cw(c29.71,24.281) 29.641,24.255 ccw(c17.731,19.858) 29.04,25.628 ccw(c28.814,25.512) 28.687,25.732 26.276,24.341 ; 13.086,25.049 cw(c13.919,23.093) 13.136,21.117 13.136,12.849 21.314,12.849 cw(c23.235,13.734) 25.165,12.872 33.395,12.872 33.395,21.124 cw(c32.551,23.094) 33.425,25.051 33.425,33.189 25.132,33.189 ccw(c23.228,34.065) 21.301,33.239 13.086,33.239 13.086,25.049 ; 19.932,23.058 ccw(c23.234,23.058) 20.374,21.407 ccw(c23.234,23.058) 21.583,20.198 ccw(c23.234,23.058) 23.234,19.756 ccw(c23.234,23.058) 24.885,20.198 ccw(c23.234,23.058) 26.093,21.407 ccw(c23.234,23.058) 26.536,23.058 ccw(c23.234,23.058) 26.093,24.709 ccw(c23.234,23.058) 24.885,25.917 ccw(c23.234,23.058) 23.234,26.36 ccw(c23.234,23.058) 21.583,25.917 ccw(c23.234,23.058) 20.374,24.709 ccw(c23.234,23.058) 19.932,23.058
  text "GND" at 37.973,43.053 h0.9
  text "+5V" at 37.973,40.513 h0.9
  text "S" at 36.068,37.973 h0.9
  text "+" at 10.264,36.83 h0.9 r180
  text "CAN" at 12.088,36.807 h0.9 r180
  text "-" at 10.945,35.895 h0.9
  text "Thomas" at 42.799,24.511 h0.9
  text "SPI / Powerstage" at 7.239,23.749 h0.9 r270
  text "Hofmann" at 42.799,23.114 h0.9
  text "+" at 8.255,13.843 h0.9 r270
  text "Vin / 3-12S" at 39.751,11.303 h0.9 r90
  text "I2C" at 8.128,11.049 h0.9 r270
  text "-" at 8.255,10.033 h0.9 r270
  text "-" at 41.402,9.83 h0.9
  text "AUX" at 21.186,9.675 h0.9